# Altium PCB PCB1.PcbDoc
Units mil, origin at the board's own origin, x right, y up, seen from the top; angles counter-clockwise.
Board outline 2755.59 x 2755.91 mil, 4 copper layers (Top Layer, GND, Power, Bottom Layer 1), stack 23.756 mil thick; 47 components, 153 nets, 446 pads, 92 vias.
Unrouted connection lines stored in the file: 70.
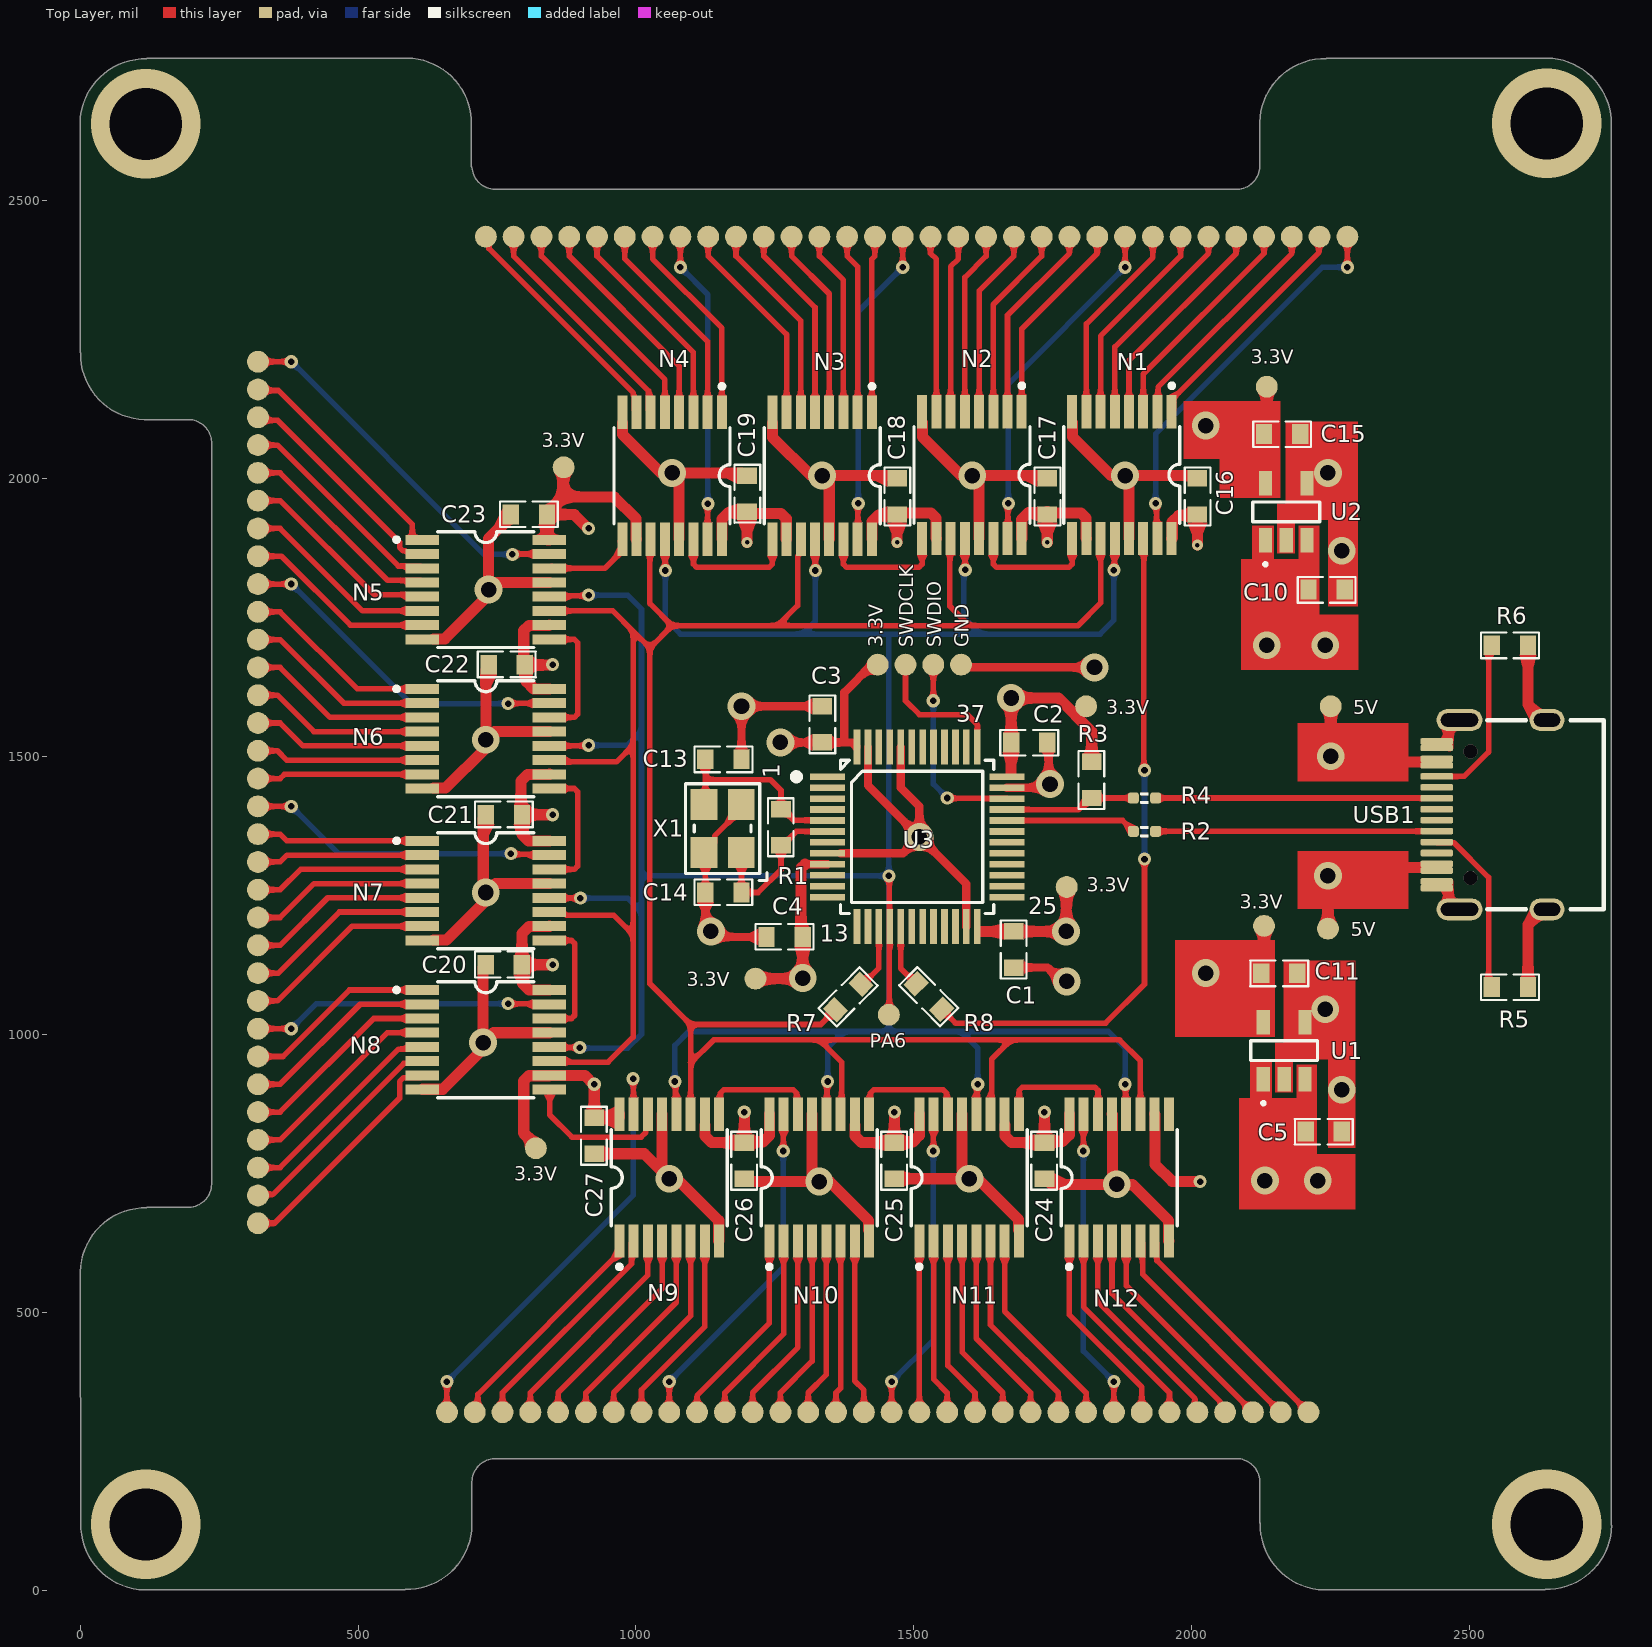
[diagram p0: Top Layer view]
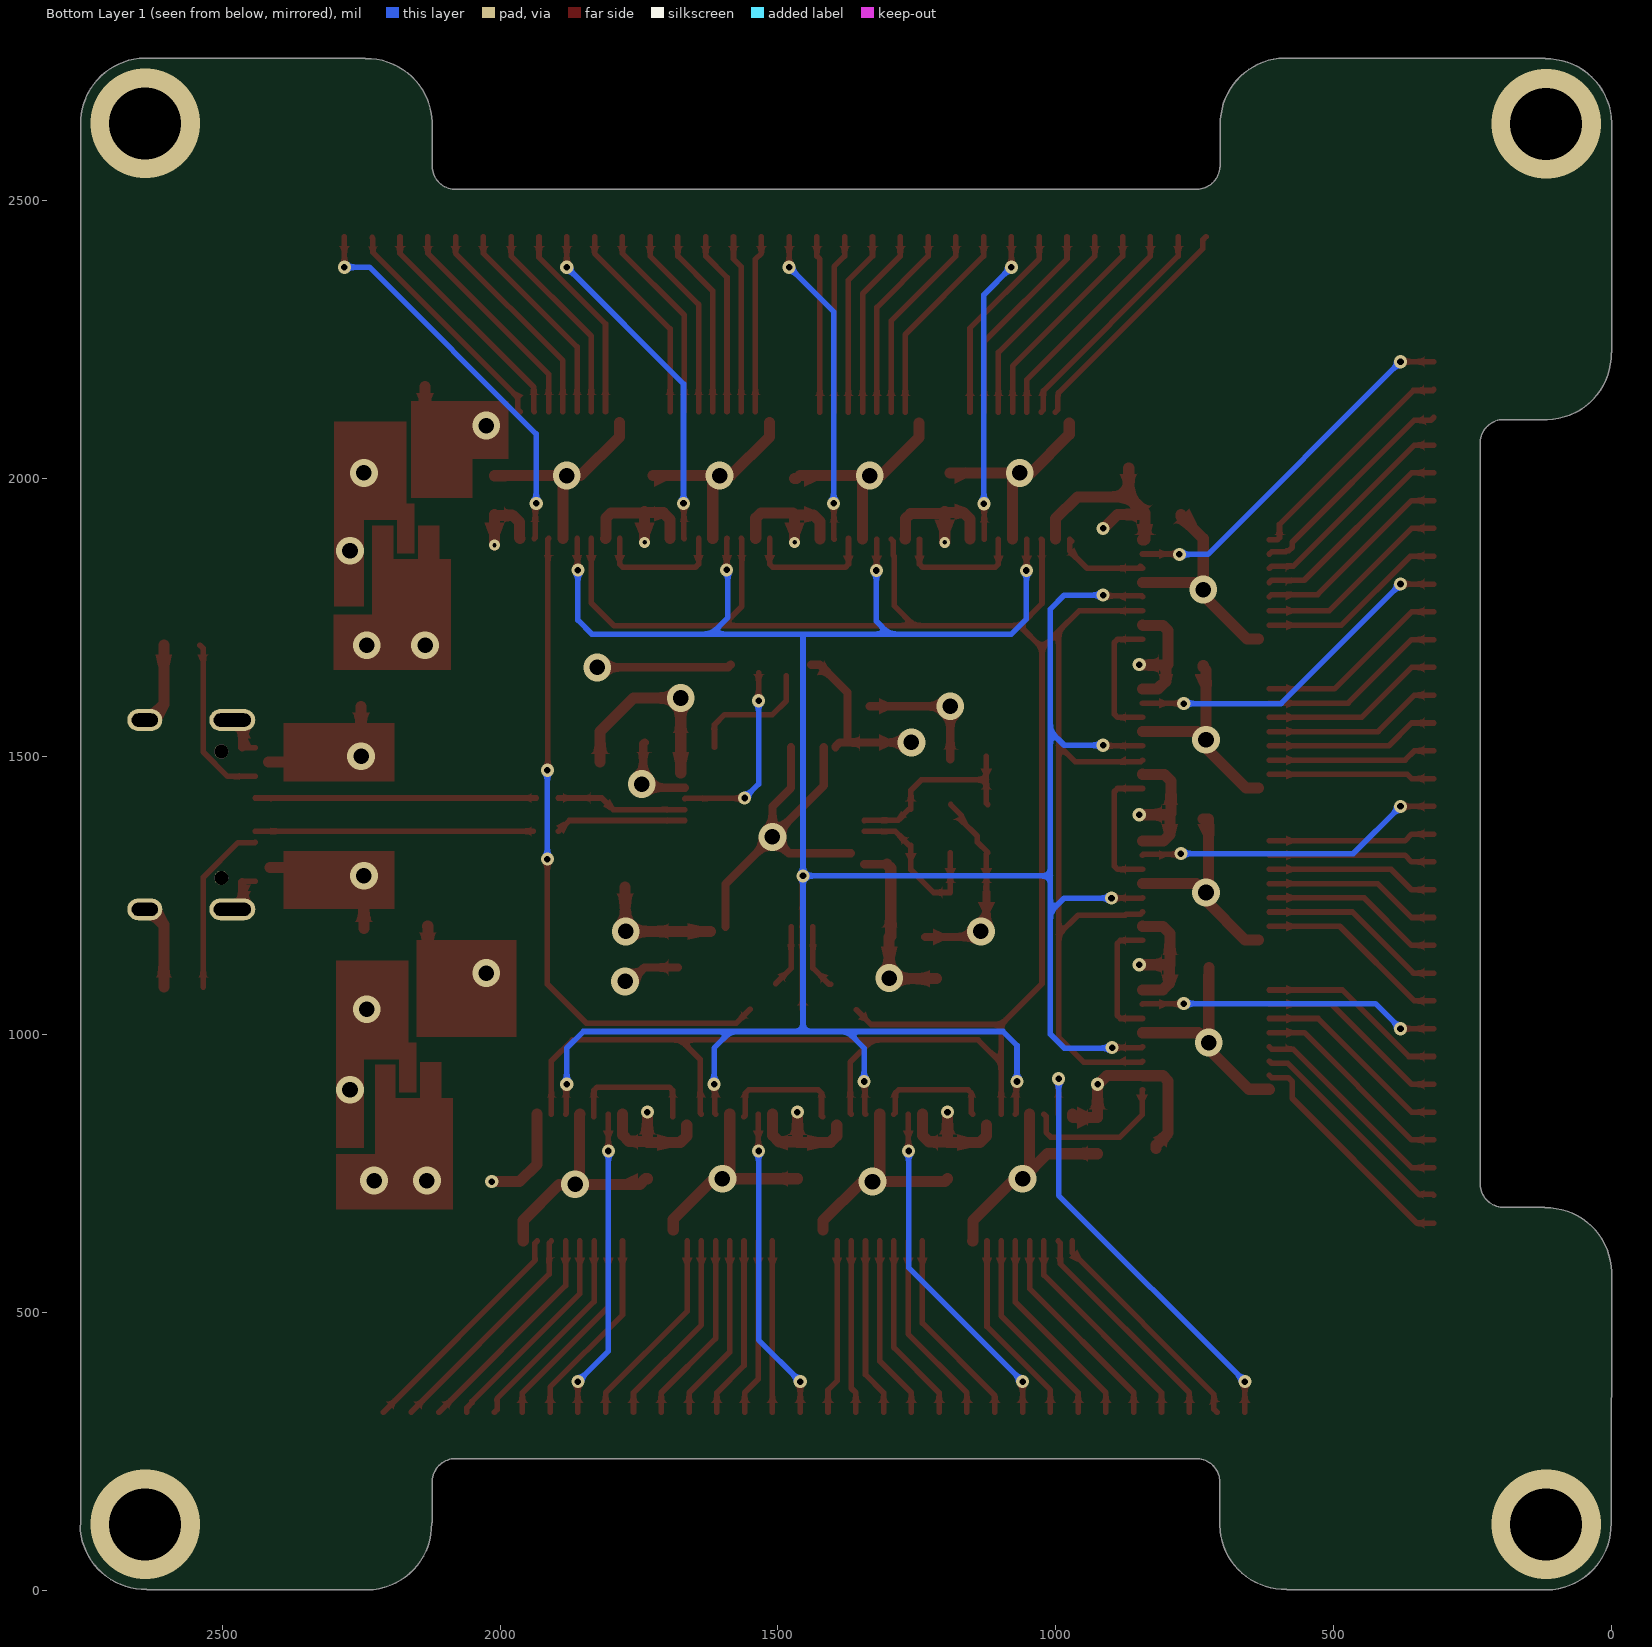
[diagram p1: Bottom Layer 1 view, seen from below]
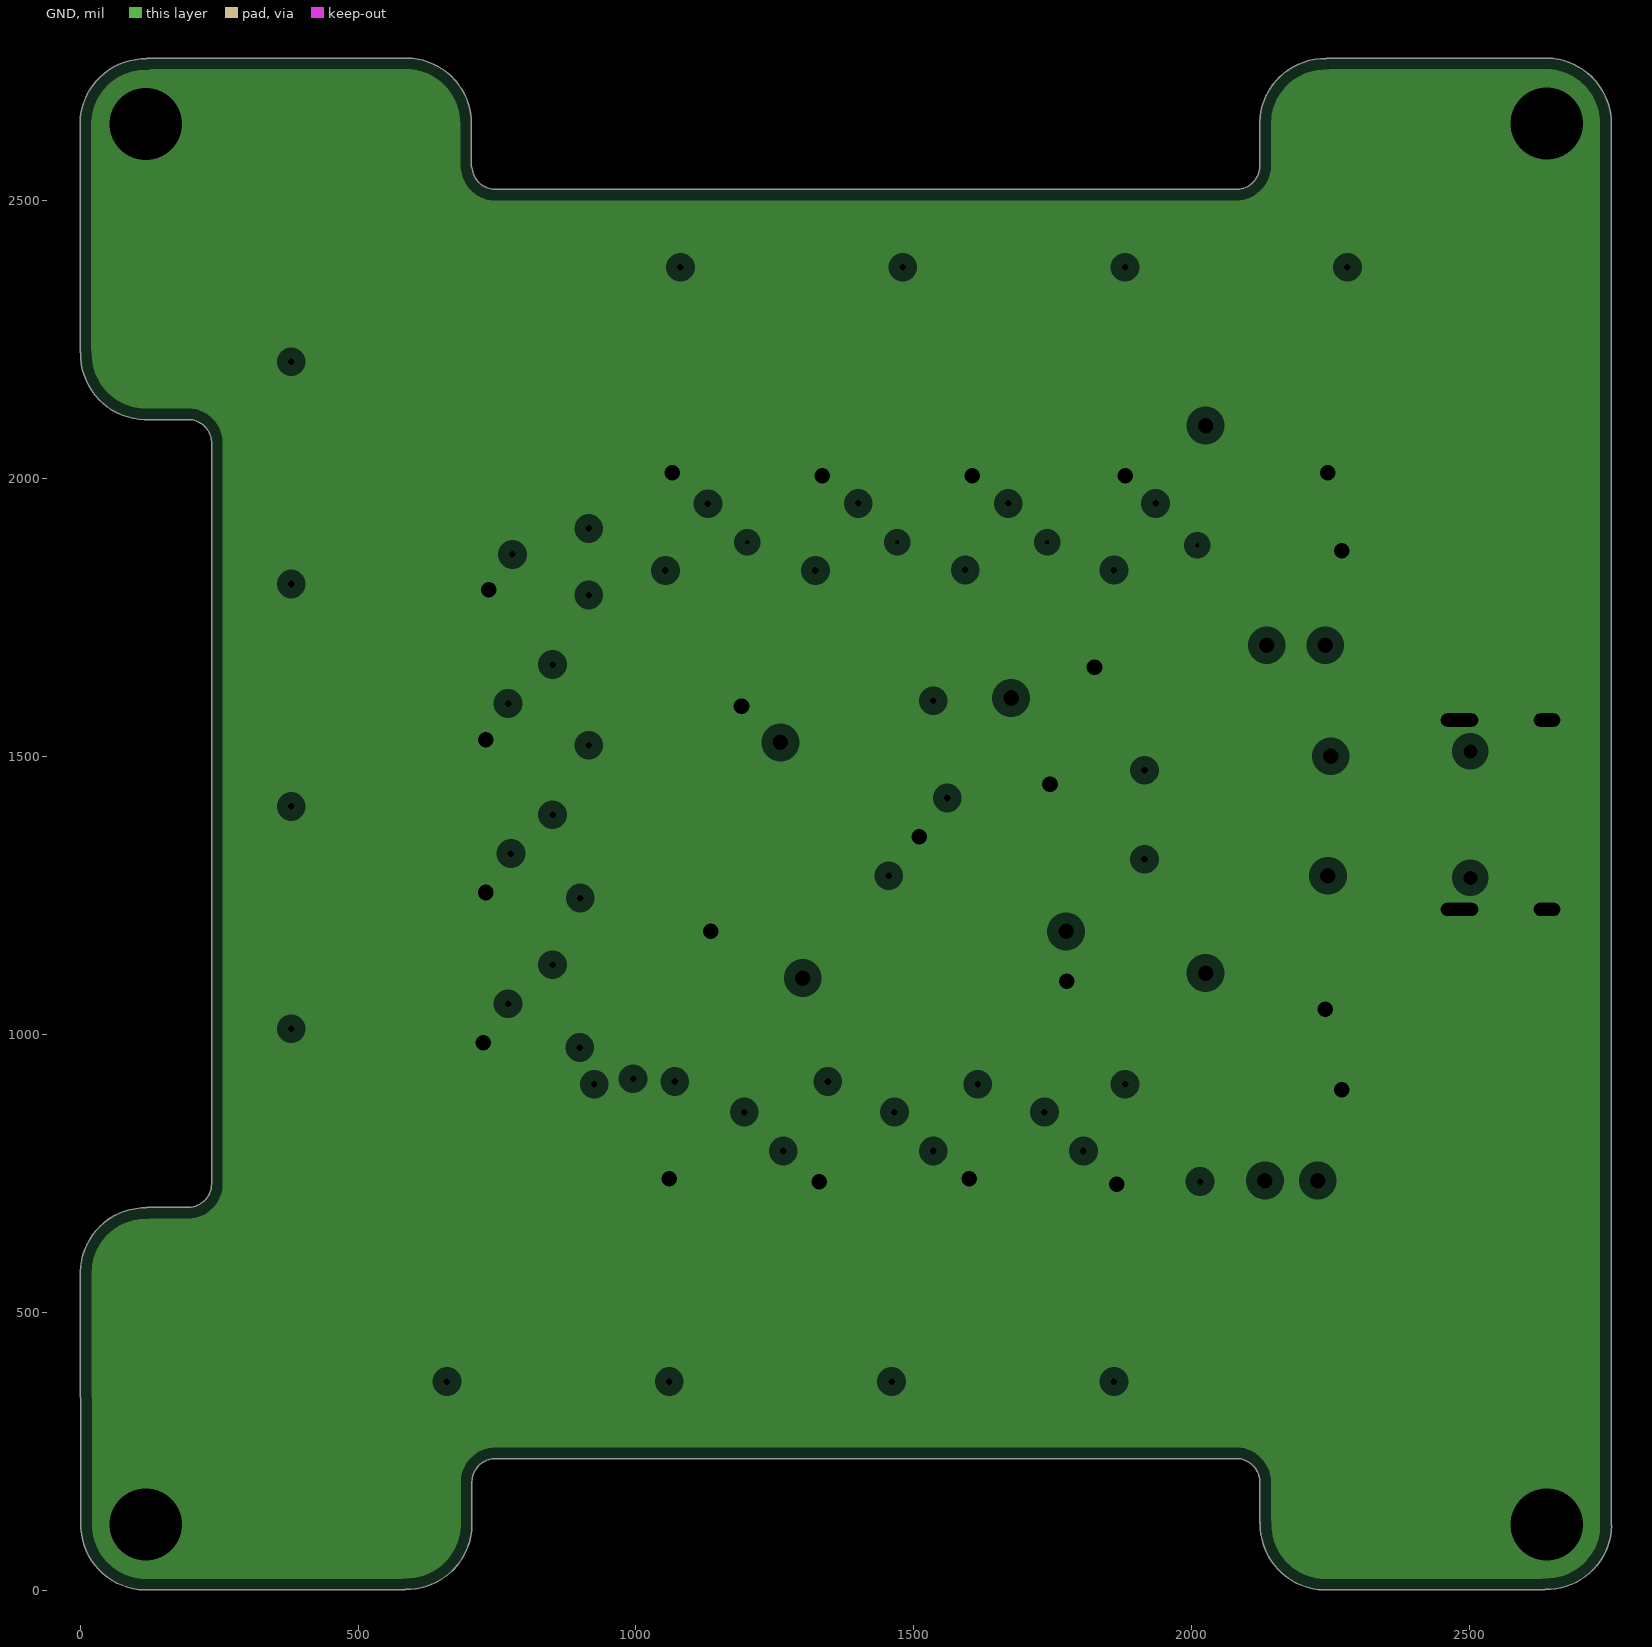
[diagram p2: GND, clearances drawn from the general rule]
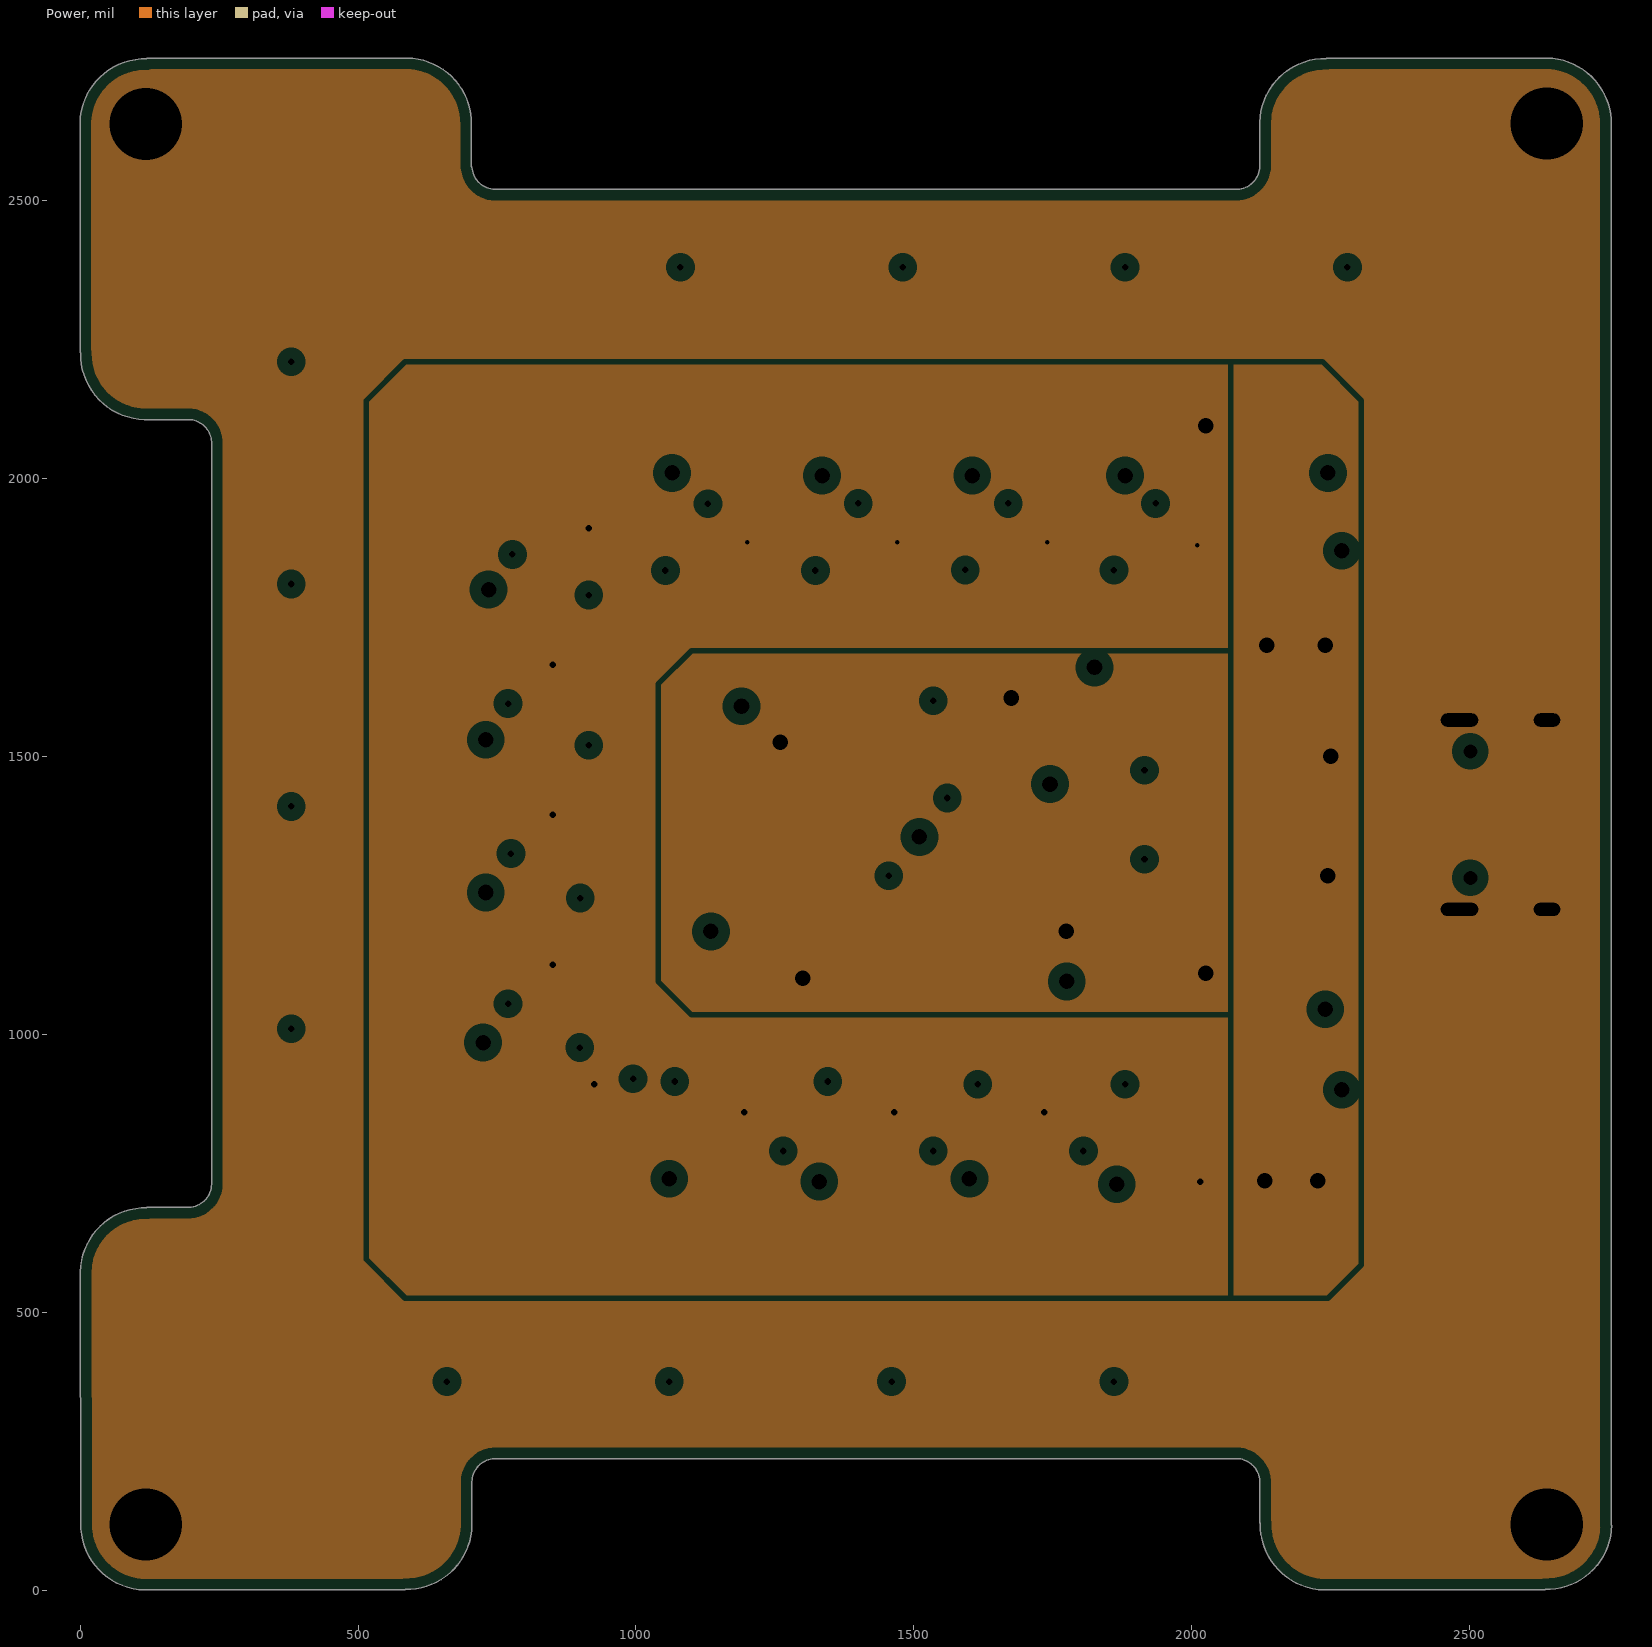
[diagram p3: Power, clearances drawn from the general rule]

## Layer stack, top to bottom
Top Solder: solder mask 0.4, Solder Resist, Dk 3.5
Top Layer: signal copper 1.378
Dielectric 2: prepreg 2.8, PP-006, Dk 4.1
GND: plane copper 1.4, net GND
Dielectric 1: dielectric 12.6, FR-4, Dk 4.8
Power: plane copper 1.4, net (Multiple Nets)
Dielectric 3: prepreg 2.8, PP-006, Dk 4.1
Bottom Layer 1: signal copper 1.378
Bottom Solder: solder mask 0.4, Solder Resist, Dk 3.5

## Board outline
1.22,120.31 0.31,572.68 cw(c117.81,570.18) 120.31,687.68 120.31,688.58 196.53,688.58 ccw(c194.03,731.08) 236.53,733.58 236.53,2065.91 ccw(c194.03,2063.41) 191.53,2105.91 115.91,2105.91 cw(c118.41,2223.41) 0.91,2225.91 0,2226.81 0,2640 cw(c117.5,2637.5) 120,2755 120,2756.22 589.09,2756.22 cw(c586.59,2638.72) 704.09,2636.22 704.09,2560.91 705,2560 ccw(c747.5,2562.5) 750,2520 2082.32,2520 ccw(c2079.82,2562.5) 2122.32,2565 2122.32,2640.31 cw(c2239.82,2637.81) 2242.32,2755.31 2242.32,2756.22 2639.69,2756.22 cw(c2637.19,2638.72) 2754.69,2636.22 2754.69,117.13 2755.59,116.22 cw(c2638.09,118.72) 2635.59,1.22 2635.59,0.31 2238.23,0.31 cw(c2240.73,117.81) 2123.23,120.31 2122.32,121.22 2122.32,196.53 ccw(c2079.82,194.03) 2077.32,236.53 745,236.53 ccw(c747.5,194.04) 705,191.53 705,116.22 cw(c587.5,118.72) 585,1.22 585,0.31 116.22,0.31 cw(c118.72,117.81)
board region "Default Layer Stack Region": 1.22,120.31 0.31,572.68 0.48,580.38 2.81,595.61 7.12,610.4 13.31,624.5 21.3,637.68 30.94,649.7 42.06,660.36 54.48,669.48 67.98,676.89 82.34,682.49 97.3,686.16 112.61,687.84 120.31,687.68 120.31,688.58 196.53,688.58 200.69,689.03 208.76,691.14 216.27,694.78 222.93,699.82 228.47,706.05 232.7,713.25 235.43,721.14 236.58,729.41 236.53,733.58 236.53,2065.91 236.09,2070.06 233.98,2078.14 230.34,2085.65 225.3,2092.3 219.06,2097.84 211.86,2102.07 203.98,2104.8 195.71,2105.95 191.53,2105.91 115.91,2105.91 108.2,2106.07 92.98,2108.41 78.18,2112.71 64.08,2118.91 50.9,2126.89 38.88,2136.53 28.22,2147.65 19.11,2160.07 11.69,2173.57 6.1,2187.93 2.43,2202.89 0.74,2218.2 0.91,2225.91 0,2226.81 0,2640 0.16,2647.7 2.5,2662.93 6.8,2677.72 13,2691.83 20.98,2705 30.62,2717.02 41.74,2727.68 54.16,2736.8 67.67,2744.22 82.02,2749.81 96.98,2753.48 112.3,2755.16 120,2755 120,2756.22 589.09,2756.22 596.8,2756.06 612.02,2753.72 626.82,2749.42 640.92,2743.22 654.1,2735.24 666.12,2725.6 676.78,2714.48 685.89,2702.06 693.31,2688.55 698.9,2674.2 702.57,2659.24 704.26,2643.92 704.09,2636.22 704.09,2560.91 705,2560 705.45,2555.85 707.56,2547.77 711.2,2540.26 716.23,2533.61 722.47,2528.06 729.67,2523.84 737.56,2521.1 745.82,2519.96 750,2520 2082.32,2520 2086.48,2520.45 2094.55,2522.56 2102.06,2526.2 2108.72,2531.23 2114.26,2537.47 2118.48,2544.67 2121.22,2552.56 2122.36,2560.82 2122.32,2565 2122.32,2640.31 2122.49,2648.02 2124.82,2663.24 2129.12,2678.04 2135.32,2692.14 2143.31,2705.32 2152.94,2717.34 2164.07,2728 2176.49,2737.11 2189.99,2744.53 2204.35,2750.12 2219.31,2753.79 2234.62,2755.48 2242.32,2755.31 2242.32,2756.22 2639.69,2756.22 2647.39,2756.06 2662.61,2753.72 2677.41,2749.42 2691.51,2743.22 2704.69,2735.24 2716.71,2725.6 2727.37,2714.48 2736.48,2702.06 2743.9,2688.55 2749.49,2674.2 2753.16,2659.24 2754.85,2643.92 2754.69,2636.22 2754.69,117.13 2755.59,116.22 2755.43,108.52 2753.09,93.29 2748.79,78.5 2742.59,64.39 2734.61,51.22 2724.97,39.2 2713.85,28.54 2701.43,19.42 2687.92,12 2673.57,6.41 2658.61,2.74 2643.29,1.06 2635.59,1.22 2635.59,0.31 2238.23,0.31 2230.53,0.48 2215.3,2.81 2200.51,7.12 2186.4,13.31 2173.23,21.3 2161.21,30.94 2150.55,42.06 2141.43,54.48 2134.01,67.98 2128.42,82.34 2124.75,97.3 2123.06,112.61 2123.23,120.31 2122.32,121.22 2122.32,196.53 2121.87,200.69 2119.77,208.76 2116.13,216.27 2111.09,222.93 2104.85,228.47 2097.65,232.7 2089.77,235.43 2081.5,236.58 2077.32,236.53 745,236.53 740.85,236.09 732.77,233.98 725.26,230.34 718.61,225.3 713.06,219.06 708.84,211.86 706.1,203.98 704.96,195.71 705,191.53 705,116.22 704.84,108.52 702.5,93.29 698.2,78.5 692,64.39 684.02,51.22 674.38,39.2 663.26,28.54 650.84,19.42 637.33,12 622.98,6.41 608.01,2.74 592.7,1.06 585,1.22 585,0.31 116.22,0.31 108.52,0.48 93.29,2.81 78.5,7.12 64.39,13.31 51.22,21.3 39.2,30.94 28.54,42.06 19.42,54.48 12,67.98 6.41,82.34 2.74,97.3 1.06,112.61
board region "Layer Stack Region 1": 1.22,120.31 0.31,572.68 0.48,580.38 2.81,595.61 7.12,610.4 13.31,624.5 21.3,637.68 30.94,649.7 42.06,660.36 54.48,669.48 67.98,676.89 82.34,682.49 97.3,686.16 112.61,687.84 120.31,687.68 120.31,688.58 196.53,688.58 200.69,689.03 208.76,691.14 216.27,694.78 222.93,699.82 228.47,706.05 232.69,713.25 235.43,721.14 236.57,729.41 236.53,733.58 236.53,2065.91 236.08,2070.06 233.98,2078.14 230.34,2085.64 225.3,2092.3 219.06,2097.84 211.86,2102.07 203.98,2104.8 195.71,2105.95 191.54,2105.91 115.91,2105.91 108.2,2106.07 92.98,2108.4 78.18,2112.71 64.08,2118.9 50.9,2126.89 38.88,2136.53 28.22,2147.65 19.11,2160.07 11.69,2173.57 6.1,2187.93 2.43,2202.89 0.74,2218.2 0.91,2225.91 0,2226.81 0,2640 0.16,2647.7 2.5,2662.93 6.8,2677.72 13,2691.83 20.98,2705 30.62,2717.02 41.74,2727.68 54.16,2736.8 67.67,2744.22 82.02,2749.81 96.98,2753.48 112.3,2755.16 120,2755 120,2756.22 589.09,2756.22 596.8,2756.06 612.02,2753.72 626.82,2749.42 640.92,2743.22 654.1,2735.24 666.12,2725.6 676.78,2714.48 685.89,2702.06 693.31,2688.55 698.9,2674.2 702.57,2659.24 704.26,2643.92 704.09,2636.22 704.09,2560.91 705,2560 705.45,2555.85 707.56,2547.77 711.2,2540.26 716.23,2533.61 722.47,2528.06 729.67,2523.84 737.56,2521.1 745.82,2519.96 750,2520 2082.32,2520 2086.48,2520.45 2094.55,2522.56 2102.06,2526.2 2108.72,2531.23 2114.26,2537.47 2118.48,2544.67 2121.22,2552.56 2122.36,2560.82 2122.32,2565 2122.32,2640.31 2122.49,2648.02 2124.82,2663.24 2129.12,2678.04 2135.32,2692.14 2143.31,2705.32 2152.94,2717.34 2164.07,2728 2176.49,2737.11 2189.99,2744.53 2204.34,2750.12 2219.31,2753.79 2234.62,2755.48 2242.32,2755.32 2242.32,2756.22 2639.69,2756.22 2647.39,2756.06 2662.62,2753.72 2677.41,2749.42 2691.51,2743.22 2704.69,2735.24 2716.71,2725.6 2727.37,2714.48 2736.49,2702.06 2743.9,2688.55 2749.49,2674.2 2753.16,2659.24 2754.85,2643.92 2754.69,2636.22 2754.69,117.13 2755.59,116.22 2755.43,108.52 2753.09,93.29 2748.79,78.5 2742.59,64.39 2734.61,51.22 2724.97,39.2 2713.85,28.54 2701.43,19.42 2687.93,12 2673.57,6.41 2658.61,2.74 2643.29,1.06 2635.59,1.22 2635.59,0.31 2238.23,0.31 2230.53,0.48 2215.3,2.81 2200.51,7.12 2186.4,13.31 2173.23,21.3 2161.21,30.94 2150.55,42.06 2141.43,54.48 2134.01,67.98 2128.42,82.34 2124.75,97.3 2123.06,112.61 2123.23,120.31 2122.32,121.22 2122.32,196.53 2121.87,200.69 2119.77,208.76 2116.13,216.27 2111.09,222.93 2104.85,228.47 2097.65,232.69 2089.77,235.43 2081.5,236.57 2077.32,236.53 745,236.53 740.85,236.08 732.77,233.98 725.26,230.34 718.61,225.3 713.06,219.06 708.84,211.86 706.1,203.98 704.96,195.71 705,191.54 705,116.22 704.84,108.52 702.5,93.29 698.2,78.5 692,64.39 684.02,51.22 674.38,39.2 663.26,28.54 650.84,19.42 637.33,12 622.98,6.41 608.02,2.74 592.7,1.06 585,1.22 585,0.31 116.22,0.31 108.52,0.48 93.29,2.81 78.5,7.12 64.39,13.31 51.22,21.3 39.2,30.94 28.54,42.06 19.42,54.48 12,67.98 6.41,82.34 2.74,97.3 1.06,112.61

## Design rules (kind name [scope] priority, off if disabled: settings)
Clearance [All] p1: gap=6 ignorepadtopadclearanceinfootprint=FALSE except(5.91: Text-Text; 11.81: Via-Poly)
ComponentClearance [All] p1: gap=6 collisioncheckmode=3 verticalgap=10 showdistances=FALSE
HoleSize [All] p1: absolutevalues=TRUE maxlimit=248.03 minlimit=7.87 maxpercent=80.000 minpercent=20.000
HoleToHoleClearance [All] p1: gap=5 allowstackedmicrovias=TRUE
MinimumSolderMaskSliver [All] p1: minsoldermaskwidth=2
PlaneClearance [All] p1: clearance=20
PlaneConnect [All] p1: planeconnectstyle=Relief reliefexpansion=20 reliefentries=4 reliefconductorwidth=10 reliefairgap=10
PolygonConnect [All] p1: connectstyle=Relief reliefconductorwidth=10 reliefentries=4 polygonreliefangle="90 Angle" airgapwidth=10
RoutingVias RoutingVias_3V3 [InNet('VCC3V3')] p1: holewidth=28 width=50 viastyle="Through Hole" minholewidth=7.87 minwidth=19.68 maxholewidth=28 maxwidth=50
RoutingVias RoutingVias_+5 [InNet('+5')] p2: holewidth=28 width=50 viastyle="Through Hole" minholewidth=28 minwidth=50 maxholewidth=28 maxwidth=50
RoutingVias [All] p3: holewidth=7.87 width=19.68 viastyle="Through Hole" minholewidth=7.87 minwidth=19.68 maxholewidth=236.22 maxwidth=248.03
SilkToSilkClearance [All] p1: silktosilkclearance=5
SilkToSolderMaskClearance [IsPad] p1: minsilkscreentomaskgap=2 clearancetoexposedcopper=TRUE
SolderMaskExpansion [All] p1: expansion=3.94 istentingtop=FALSE
SupplyNets "Schematic Supply Nets_3" [InNet('VCC3V3_MCU')] p1: voltage=0.000
SupplyNets "Schematic Supply Nets_2" [InNet('GND')] p2: voltage=0.000
SupplyNets "Schematic Supply Nets_1" [InNet('VCC3V3')] p3: voltage=0.000
SupplyNets "Schematic Supply Nets" [InNet('+5')] p4: voltage=0.000
Width Width_3V3 [InNet('VCC3V3')] p1 off: maxlimit=100 minlimit=10 preferedwidth=20
Width Width_+5 [InNet('+5')] p2: maxlimit=100 minlimit=10 preferedwidth=20
Width [All] p3: maxlimit=100 minlimit=5 preferedwidth=10
22 further rules are at their usual default settings.

## Components (designator, comment, footprint, x,y, rotation, side; value= is the part's Value field where it differs from the comment)
C1 "104，X7R" 0603 1680,1120 r90 top
C2 "104，X7R" 0603 1740,1525 r180 top
C3 "104，X7R" 0603 1335,1589.96 r270 top
C4 "104，X7R" 0603 1235,1175 r0 top
C5 "105，X7R" 0603 2270,825 r180 top
C10 "105，X7R" 0603 2275,1800 r180 top
C11 "105，X7R" 0603 2189.96,1110 r180 top
C13 "16pF,NP0" 0603 1190,1495 r180 top
C14 "16pF,NP0" 0603 1125,1255 r0 top
C15 "105，X7R" 0603 2194.96,2080 r180 top
C16 "104" 0603 2010,2000 r270 top
C17 "104" 0603 1740,2000 r270 top
C18 "104" 0603 1470,2000 r270 top
C19 "104" 0603 1200,2004.96 r270 top
C20 "104" 0603 730,1125 r0 top
C21 "104" 0603 730.04,1395 r0 top
C22 "104" 0603 735,1665 r0 top
C23 "104" 0603 775,1935 r0 top
C24 "104" 0603 1735,740.04 r90 top
C25 "104" 0603 1465,740 r90 top
C26 "104" 0603 1195,740.04 r90 top
C27 "104" 0603 925,785.04 r90 top
N1 "SN74HC595PWR" TSSOP16-0r65-5r0x4r4-H1r2 1874.33,2006.06 r270 top
N2 "SN74HC595PWR" TSSOP16-0r65-5r0x4r4-H1r2 1604.55,2006.06 r270 top
N3 "SN74HC595PWR" TSSOP16-0r65-5r0x4r4-H1r2 1335,2005 r270 top
N4 "SN74HC595PWR" TSSOP16-0r65-5r0x4r4-H1r2 1065,2005 r270 top
N5 "SN74HC595PWR" TSSOP16-0r65-5r0x4r4-H1r2 730,1800 r0 top
N6 "SN74HC595PWR" TSSOP16-0r65-5r0x4r4-H1r2 730,1531.67 r0 top
N7 "SN74HC595PWR" TSSOP16-0r65-5r0x4r4-H1r2 730,1258.33 r0 top
N8 "SN74HC595PWR" TSSOP16-0r65-5r0x4r4-H1r2 730,990 r0 top
N9 "SN74HC595PWR" TSSOP16-0r65-5r0x4r4-H1r2 1060,742.17 r90 top
N10 "SN74HC595PWR" TSSOP16-0r65-5r0x4r4-H1r2 1329.78,742.17 r90 top
N11 "SN74HC595PWR" TSSOP16-0r65-5r0x4r4-H1r2 1599.55,742.17 r90 top
N12 "SN74HC595PWR" TSSOP16-0r65-5r0x4r4-H1r2 1869.33,742.17 r90 top
R1 "910" 0603 1260.99,1340 r90 top
R2 "220" RES_0402 1915,1365 r180 top value=22R
R3 "152" 0603 1820,1425 r90 top
R4 "220" RES_0402 1915,1425 r180 top value=22R
R5 "512" 0603 2604.96,1085 r180 top
R6 "512" 0603 2604.96,1700 r180 top
R7 "330" 0603 1359.07,1044.03 r45 top
R8 "330" 0603 1550,1045 r135 top
U1 "LP5951MF-3.3" SOT23-5_2r90x1r60-H1r18-P0r95_G 2166.32,970.46 r0 top
U2 "LP5951MF-3.3" SOT23-5_2r90x1r60-H1r18-P0r95_G 2170,1940 r0 top
U3 "STM32F103C6T7A" LQFP48-0r5-7x7-H1r6 1505.99,1355 r0 top
USB1 "Type-C" TYPE-C_16P 2540,1395 r0 top
X1 "7V-8.000MAAE-T" RESO3225-4_3r20x2r50-H0r90-P2r10 1155.99,1370 r90 top

## Footprints (in the part's own frame and the unit in brackets; to place one, negate y for a bottom-side part, rotate by r counter-clockwise, add the part's x,y. Pads: shape width x height; smd on the part's side, far side on the other; paste and mask are expansions set on the pad)
0603 [mm]
  rect 0.75x0.9 smd mask+0.1: 1(0,0) 2(1.65,0)
  silkscreen extent -0.5,-0.58 2.15,0.6
LQFP48-0r5-7x7-H1r6 [mm]
  rect 1.6x0.305 smd paste+0 mask+0.051: 1(-4.1,2.75) 2(-4.1,2.25) 3(-4.1,1.75) 4(-4.1,1.25) 5(-4.1,0.75) 6(-4.1,0.25) 7(-4.1,-0.25) 8(-4.1,-0.75) 9(-4.1,-1.25) 10(-4.1,-1.75) 11(-4.1,-2.25) 12(-4.1,-2.75) 25(4.1,-2.75) 26(4.1,-2.25) 27(4.1,-1.75) 28(4.1,-1.25) 29(4.1,-0.75) 30(4.1,-0.25) 31(4.1,0.25) 32(4.1,0.75) 33(4.1,1.25) 34(4.1,1.75) 35(4.1,2.25) 36(4.1,2.75)
  rect 0.305x1.6 smd paste+0 mask+0.051: 13(-2.75,-4.1) 14(-2.25,-4.1) 15(-1.75,-4.1) 16(-1.25,-4.1) 17(-0.75,-4.1) 18(-0.25,-4.1) 19(0.25,-4.1) 20(0.75,-4.1) 21(1.25,-4.1) 22(1.75,-4.1) 23(2.25,-4.1) 24(2.75,-4.1) 37(2.75,4.1) 38(2.25,4.1) 39(1.75,4.1) 40(1.25,4.1) 41(0.75,4.1) 42(0.25,4.1) 43(-0.25,4.1) 44(-0.75,4.1) 45(-1.25,4.1) 46(-1.75,4.1) 47(-2.25,4.1) 48(-2.75,4.1)
  silkscreen extent -5.67,-3.5 3.5,3.5, body extent -3.52,-3.52 3.52,3.52, height 0.25
RES_0402 [mil] "RES_0402"
  rrect50% 20x20 smd mask+4: 1(-20,0) 2(20,0)
  silkscreen extent -7,-10 7,10, body extent -20,-10 20,10, height 14
RESO3225-4_3r20x2r50-H0r90-P2r10 [mil]
  rect 56x48 smd paste+0 mask+2.95: 1(-43.31,-33.46) 2(43.31,-33.46) 3(43.31,33.46) 4(-43.31,33.46)
  silkscreen extent -94,-80 81,67, body extent -64,-50 64,50, height 10
SOT23-5_2r90x1r60-H1r18-P0r95_G [mil]
  rect 24x44 smd paste+0 mask+2.95: 1(-37.4,-51.18) 2(0,-51.18) 3(37.4,-51.18) 4(37.4,51.18) 5(-37.4,51.18)
  silkscreen extent -60,-97 60,18, body extent -58,-32 58,32, height 10
TSSOP16-0r65-5r0x4r4-H1r2 [mm]
  rect 1.524x0.457 smd paste+0 mask+0.038: 1(-2.9,2.275) 2(-2.9,1.625) 3(-2.9,0.975) 4(-2.9,0.325) 5(-2.9,-0.325) 6(-2.9,-0.975) 7(-2.9,-1.625) 8(-2.9,-2.275) 9(2.9,-2.275) 10(2.9,-1.625) 11(2.9,-0.975) 12(2.9,-0.325) 13(2.9,0.325) 14(2.9,0.975) 15(2.9,1.625) 16(2.9,2.275)
  silkscreen extent -4.18,-2.65 2.2,2.65, body extent -2.22,-2.52 2.22,2.52, height 0.25
TYPE-C_16P [mm] "TYPE-C_16P"
  round 0.65 hole 0.65: 0(-0.98,-2.89) 0(-0.98,2.89)
  oval 1.6x1 hole 0.6 slot 1.2 at 0 deg: 1(2.52,4.325) 2(2.52,-4.325)
  oval 2.1x1 hole 0.6 slot 1.7 at 0 deg: 3(-1.48,-4.325) 4(-1.48,4.325)
  rrect50% 1.5x0.3 smd: A1(-2.52,-3.35) A4(-2.52,-2.55) A5(-2.52,-1.25) A6(-2.52,-0.25) A7(-2.52,0.25) A8(-2.52,1.25) A9(-2.52,2.55) A12(-2.52,3.35) B1(-2.52,3.05) B4(-2.52,2.25) B5(-2.52,1.75) B6(-2.52,0.75) B7(-2.52,-0.75) B8(-2.52,-1.75) B9(-2.52,-2.25) B12(-2.52,-3.05)
  silkscreen extent -0.22,-4.33 5.12,4.33, body extent -2.57,-4.48 5.18,4.48, height 3.26

## Part data
C1 C2 C3 C4 C5 C10 C11 C13 C14 C15 C16 C17 C18 C19 C20 C21 C22 C23 C24 C25 C26 C27: library part 0603电容
R1 R3 R5 R6 R7 R8: library part 0603电阻
R2 R4: library part Resistor_SMD, "Resistor_SMD"
USB1: library part USB-Type-C, "USB-Type-C_16P"

## Free pads (board coordinates)
  round 39.37 smd mask+4: 1(320,660) 1(320,1060) 1(320,1460) 1(320,1860) 1(660,320) 1(1060,320) 1(1080,2435) 1(1460,320) 1(1480,2435) 1(1585,1665) 1(1860,320) 1(1880,2435) 1(2280,2435) 2(320,710) 2(320,1110) 2(320,1510) 2(320,1910) 2(710,320) 2(1030,2435) 2(1110,320) 2(1430,2435) 2(1510,320) 2(1535,1665) 2(1830,2435) 2(1910,320) 2(2230,2435) 3(320,760) 3(320,1160) 3(320,1560) 3(320,1960) 3(760,320) 3(980,2435) 3(1160,320) 3(1380,2435) 3(1485,1665) 3(1560,320) 3(1780,2435) 3(1960,320) 3(2180,2435) 4(320,810) 4(320,1210) 4(320,1610) 4(320,2010) 4(810,320) 4(930,2435) 4(1210,320) 4(1330,2435) 4(1435,1665) 4(1610,320) 4(1730,2435) 4(2010,320) 4(2130,2435) 5(320,860) 5(320,1260) 5(320,1660) 5(320,2060) 5(860,320) 5(880,2435) 5(1260,320) 5(1280,2435) 5(1660,320) 5(1680,2435) 5(2060,320) 5(2080,2435) 6(320,910) 6(320,1310) 6(320,1710) 6(320,2110) 6(830,2435) 6(910,320) 6(1230,2435) 6(1310,320) 6(1630,2435) 6(1710,320) 6(2030,2435) 6(2110,320) 7(320,960) 7(320,1360) 7(320,1760) 7(320,2160) 7(780,2435) 7(960,320) 7(1180,2435) 7(1360,320) 7(1580,2435) 7(1760,320) 7(1980,2435) 7(2160,320) 8(320,1010) 8(320,1410) 8(320,1810) 8(320,2210) 8(730,2435) 8(1010,320) 8(1130,2435) 8(1410,320) 8(1530,2435) 8(1810,320) 8(1930,2435) 8(2210,320)
  round 39.37 smd paste-99999 mask+3.94: 9(1810,1590) 10(1775,1265) 11(1215,1100) 12(820,795) 13(870,2020) 14(2250,1590) 15(2245,1190) 16(2135,2165) 17(2130,1195) 18(1455,1035)

## Via types
v1: diameter 23.62, hole 11.81, Top Layer to Bottom Layer 1, tented both sides, 50 vias
v2: diameter 50, hole 28, Top Layer to Bottom Layer 1, tented both sides, 34 vias
v3: diameter 19.68, hole 7.87, Top Layer to Bottom Layer 1, tented both sides, 4 vias
v4: diameter 196.85, hole 129.92, Top Layer to Bottom Layer 1, 4 vias

## Nets (pads, with @x,y where several pads share a name; then routed paths per layer and width w, separated by ;. In a path a pad name is that pad's centre, name@x,y a point inside that pad or via, vN(x,y) a via of type N, cw(c..) or ccw(c..) an arc to the next point about the centre after c; other vN are vias at no path point)
+5: C5.2 C10.2 pad.14 pad.15 U1.1 U1.3 U2.1 U2.3 USB1.A4 USB1.A9 USB1.B4 USB1.B9 | length 528
  Top Layer w15: v2@2265,1290 2275,1300
  Top Layer w20: U2.1@2131.3,1887.52 U2.1 ; v2(2135,1700) v2@2141.18,1706.18 ; pad.15 v2(2245,1285) ; v2@2245,1502.5 v2@2247.5,1500 ; pad.14 v2(2250,1500) v2@2247.5,1500 ; 2275,1300 USB1.A4@2413.94,1300 ; USB1.A9@2416.67,1490 2257.5,1490 v2@2247.5,1500
  other v2: 2131.68,736.68 2226.68,736.68 2240,1700
bit1: N1.15 pad.1@2280,2435 | length 713.7
  Top Layer w10: v1(1935,1955) 1936.65,1953.35 1936.65,1893.54 N1.15 ; v1(2280,2380) pad.1@2280,2435
  Bottom Layer 1 w10: v1(1935,1955) 1935,2080 2235,2380 v1(2280,2380)
bit2: N1.1 pad.2@2230,2435 | length 423.4
  Top Layer w10: N1.1 1967.89,2124.23 1967.89,2145.75 2228.77,2406.63 2228.77,2431.27 pad.2@2230.33,2433.46
bit3: N1.2 pad.3@2180,2435 | length 414.9
  Top Layer w10: N1.2 1939.38,2121.3 1939.38,2164.38 2180,2405 pad.3@2180,2435
bit4: N1.3 pad.4@2130,2435 | length 404.8
  Top Layer w10: N1.3 1912.72,2187.72 2130,2405 pad.4@2130,2435
bit5: N1.4 pad.5@2080,2435 | length 394.7
  Top Layer w10: N1.4 1887.13,2212.13 2080,2405 pad.5@2080,2435
bit6: N1.5 pad.6@2030,2435 | length 384.5
  Top Layer w10: N1.5 1861.54,2236.54 2030,2405 pad.6@2030,2435
bit7: N1.6 pad.7@1980,2435 | length 374.4
  Top Layer w10: N1.6 1835.95,2255.95 1980,2400 pad.7@1980,2435
bit8: N1.7 pad.8@1930,2435 | length 364.3
  Top Layer w10: N1.7 1810.35,2278.09 1930,2397.74 pad.8@1930,2435
bit9: N2.15 pad.1@1880,2435 | length 635.7
  Top Layer w10: N2.15 1669.27,1892.63 1669.27,1954.27 v1(1670,1955) ; v1@1880,2375 v1(1880,2380) pad.1@1880,2435
  Bottom Layer 1 w10: v1(1670,1955) 1670,2170 v1(1880,2380)
bit10: N2.1 pad.2@1830,2435 | length 371
  Top Layer w10: N2.1 1694.12,2269.12 1830,2405 pad.2@1830,2435
bit11: N2.2 pad.3@1780,2435 | length 360.9
  Top Layer w10: N2.2 1668.53,2293.53 1780,2405 pad.3@1780,2435
bit12: N2.3 pad.4@1730,2435 | length 350.8
  Top Layer w10: N2.3 1642.94,2312.94 1730,2400 pad.4@1730,2435
bit13: N2.4 pad.5@1680,2435 | length 340.7
  Top Layer w10: N2.4 1617.35,2337.35 1680,2400 pad.5@1680,2435
bit14: N2.5 pad.6@1630,2435 | length 330.6
  Top Layer w10: N2.5 1591.76,2361.76 1630,2400 pad.6@1630,2435
bit15: N2.6 pad.7@1580,2435 | length 320.5
  Top Layer w10: N2.6 1566.17,2381.17 1580,2395 pad.7@1580,2435
bit16: N2.7 pad.8@1530,2435 | length 319.1
  Top Layer w10: pad.8@1530,2435 1530,2405 1540.58,2394.42 N2.7
bit17: N3.15 pad.1@1480,2435 | length 577.7
  Top Layer w10: N3.15 1399.49,1891.34 1399.49,1954.49 v1(1400,1955) ; v1(1480,2380) 1480,2386.81 pad.1@1480,2435
  Bottom Layer 1 w10: v1(1400,1955) 1400,2300 v1(1480,2380)
bit18: N3.1 pad.2@1430,2435 | length 318.1
  Top Layer w10: N3.1 1424.57,2394.57 1430,2400 pad.2@1430,2435
bit19: N3.2 pad.3@1380,2435 | length 323.7
  Top Layer w10: pad.3@1380,2435 1380,2400 1398.98,2381.02 N3.2
bit20: N3.3 pad.4@1330,2435 | length 333.8
  Top Layer w10: pad.4@1330,2435 1330,2400 1373.39,2356.61 N3.3
bit21: N3.4 pad.5@1280,2435 | length 343.9
  Top Layer w10: pad.5@1280,2435 1280,2400 1347.8,2332.2 N3.4
bit22: N3.5 pad.6@1230,2435 | length 354
  Top Layer w10: pad.6@1230,2435 1230,2400 1322.2,2307.8 N3.5
bit23: N3.6 pad.7@1180,2435 | length 364.1
  Top Layer w10: pad.7@1180,2435 1180,2400 1296.61,2283.39 N3.6
bit24: N3.7 pad.8@1130,2435 | length 374.2
  Top Layer w10: pad.8@1130,2435 1130,2400 1271.02,2258.98 N3.7
bit25: N4.15 pad.1@1080,2435 | length 569.2
  Top Layer w10: v1@1080,2375 v1(1080,2380) pad.1@1080,2435 ; N4.15 v1@1128.98,1953.98
  Bottom Layer 1 w10: v1(1080,2380) 1129.49,2330.51 v1(1129.49,1954.49)
bit26: N4.1 pad.2@1030,2435 | length 367.4
  Top Layer w10: pad.2@1030,2435 1030,2395 1154.57,2270.43 N4.1
bit27: N4.2 pad.3@980,2435 | length 377.5
  Top Layer w10: pad.3@980,2435 980,2395 1128.98,2246.02 N4.2
bit28: N4.3 pad.4@930,2435 | length 387.6
  Top Layer w10: pad.4@930,2435 930,2400 1103.38,2226.62 N4.3
bit29: N4.4 pad.5@880,2435 | length 397.8
  Top Layer w10: pad.5@880,2435 880,2400 1077.79,2202.21 N4.4
bit30: N4.5 pad.6@830,2435 | length 407.9
  Top Layer w10: pad.6@830,2435 830,2400 1052.2,2177.8 N4.5
bit31: N4.6 pad.7@780,2435 | length 418
  Top Layer w10: pad.7@780,2435 780,2400 1022.62,2157.38 1022.62,2123.17 N4.6
bit32: N4.7 pad.8@730,2435 | length 428.1
  Top Layer w10: pad.8@730,2435 735.62,2429.38 735.62,2413.54 995.43,2153.73 995.43,2150.03 997.03,2148.43 997.03,2123.17 N4.7
bit33: N5.15 pad.8@320,2210 | length 668
  Top Layer w10: pad.8@320,2210 v1(380,2210) ; v1(777.76,1863.38) 778.35,1863.98 N5.15
  Bottom Layer 1 w10: v1(380,2210) 726.62,1863.38 v1(777.76,1863.38)
bit34: N5.1 pad.7@320,2160 | length 421.8
  Top Layer w10: pad.7@320,2160 321.83,2158.17 356.83,2158.17 597.69,1917.31 597.69,1893.56 601.68,1889.57 N5.1
bit35: N5.2 pad.6@320,2110 | length 403.1
  Top Layer w10: pad.6@320,2110 325.62,2104.38 355.62,2104.38 574.83,1885.17 574.83,1876.01 581.27,1869.57 584.97,1869.57 586.57,1867.97 611.83,1867.97 N5.2
bit36: N5.3 pad.5@320,2060 | length 387.6
  Top Layer w10: pad.5@320,2060 355,2060 572.62,1842.38 611.83,1842.38 N5.3
bit37: N5.4 pad.4@320,2010 | length 377.5
  Top Layer w10: pad.4@320,2010 360,2010 553.21,1816.79 611.83,1816.79 N5.4
bit38: N5.5 pad.3@320,1960 | length 367.4
  Top Layer w10: pad.3@320,1960 360,1960 529.21,1790.79 612.24,1790.79 N5.5
bit39: N5.6 pad.2@320,1910 | length 357.3
  Top Layer w10: pad.2@320,1910 360,1910 508.39,1761.61 N5.6
bit40: N5.7 pad.1@320,1860 | length 347.2
  Top Layer w10: pad.1@320,1860 362.26,1860 486.24,1736.02 N5.7
bit41: N6.15 pad.8@320,1810 | length 613.5
  Top Layer w10: pad.8@320,1810 v1(380,1810) ; v1(770,1595) 770.32,1595.32 843.85,1595.32 N6.15
  Bottom Layer 1 w10: v1(380,1810) 595,1595 v1(770,1595)
bit42: N6.1 pad.7@320,1760 | length 353.3
  Top Layer w10: pad.7@320,1760 360,1760 498.77,1621.23 N6.1
bit43: N6.2 pad.6@320,1710 | length 343.2
  Top Layer w10: pad.6@320,1710 360,1710 474.36,1595.64 N6.2
bit44: N6.3 pad.5@320,1660 | length 333.1
  Top Layer w10: pad.5@320,1660 360,1660 449.95,1570.05 N6.3
bit45: N6.4 pad.4@320,1610 | length 323
  Top Layer w10: pad.4@320,1610 355,1610 420.54,1544.46 N6.4
bit46: N6.5 pad.3@320,1560 | length 312.9
  Top Layer w10: pad.3@320,1560 360,1560 401.13,1518.87 N6.5
bit47: N6.6 pad.2@320,1510 | length 302.8
  Top Layer w10: pad.2@320,1510 355,1510 371.72,1493.28 N6.6
bit48: N6.7 pad.1@320,1460 | length 299
  Top Layer w10: pad.1@320,1460 360,1460 367.69,1467.69 N6.7
bit49: N7.15 pad.8@320,1410 | length 560.5
  Top Layer w10: pad.8@320,1410 v1(380,1410) ; v1(775,1325) 776.35,1323.66 842.83,1323.66 N7.15
  Bottom Layer 1 w10: v1(380,1410) 465,1325 v1(775,1325)
bit50: N7.1 pad.7@320,1360 | length 300.8
  Top Layer w10: pad.7@320,1360 360,1360 372.1,1347.9 N7.1
bit51: N7.2 pad.6@320,1310 | length 300.9
  Top Layer w10: pad.6@320,1310 360,1310 372.31,1322.31 N7.2
bit52: N7.3 pad.5@320,1260 | length 311
  Top Layer w10: pad.5@320,1260 360,1260 396.72,1296.72 N7.3
bit53: N7.4 pad.4@320,1210 | length 321.1
  Top Layer w10: pad.4@320,1210 360,1210 421.13,1271.13 N7.4
bit54: N7.5 pad.3@320,1160 | length 331.3
  Top Layer w10: pad.3@320,1160 360,1160 445.54,1245.54 N7.5
bit55: N7.6 pad.2@320,1110 | length 341.4
  Top Layer w10: pad.2@320,1110 356.59,1110 466.54,1219.95 N7.6
bit56: N7.7 pad.1@320,1060 | length 351.5
  Top Layer w10: pad.1@320,1060 355,1060 489.36,1194.36 N7.7
bit57: N8.15 pad.8@320,1010 | length 543.2
  Top Layer w10: pad.8@320,1010 v1(380,1010) ; v1(770,1055) 770.51,1054.49 843.66,1054.49 N8.15
  Bottom Layer 1 w10: v1(380,1010) 425,1055 v1(770,1055)
bit58: N8.1 pad.7@320,960 | length 345.4
  Top Layer w10: pad.7@320,960 365,960 484.57,1079.57 N8.1
bit59: N8.2 pad.6@320,910 | length 355.5
  Top Layer w10: pad.6@320,910 360,910 503.98,1053.98 N8.2
bit60: N8.3 pad.5@320,860 | length 365.6
  Top Layer w10: pad.5@320,860 360,860 528.39,1028.39 N8.3
bit61: N8.4 pad.4@320,810 | length 375.7
  Top Layer w10: pad.4@320,810 360,810 552.8,1002.8 N8.4
bit62: N8.5 pad.3@320,760 | length 385.8
  Top Layer w10: pad.3@320,760 360,760 573.21,973.21 611.83,973.21 N8.5
bit63: N8.6 pad.2@320,710 | length 395.9
  Top Layer w10: pad.2@320,710 322.03,712.03 347.03,712.03 582.62,947.62 611.83,947.62 N8.6
bit64: N8.7 pad.1@320,660 | length 423.6
  Top Layer w10: pad.1@320,660 350,660 574.83,884.83 574.83,914.83 582.03,922.03 611.83,922.03 N8.7
bit65: N9.15 pad.1@660,320 | length 802.8
  Top Layer w10: pad.1@660,320 v1(660,375) ; v1(995,920) 995.51,919.49 995.51,856.85 N9.15
  Bottom Layer 1 w10: v1(660,375) 995,710 v1(995,920)
bit66: N9.1 pad.2@710,320 | length 415.9
  Top Layer w10: pad.2@710,320 715.62,325.62 715.62,352.17 970.43,606.99 N9.1
bit67: N9.2 pad.3@760,320 | length 405.8
  Top Layer w10: pad.3@760,320 760,355 992.03,587.03 992.03,624 N9.2
bit68: N9.3 pad.4@810,320 | length 395.6
  Top Layer w10: pad.4@810,320 810,355 1021.61,566.61 N9.3
bit69: N9.4 pad.5@860,320 | length 385.5
  Top Layer w10: pad.5@860,320 860,355 1047.2,542.2 N9.4
bit70: N9.5 pad.6@910,320 | length 375.4
  Top Layer w10: pad.6@910,320 910,355 1072.8,517.8 N9.5
bit71: N9.6 pad.7@960,320 | length 365.3
  Top Layer w10: pad.7@960,320 960,355 1098.39,493.39 N9.6
bit72: N9.7 pad.8@1010,320 | length 355.2
  Top Layer w10: pad.8@1010,320 1010,360 1123.98,473.98 N9.7
bit73: N10.15 pad.1@1060,320 | length 621.6
  Top Layer w10: pad.1@1060,320 v1(1060,375) ; v1(1265,790) 1265.4,790.4 1265.4,855.94 N10.15
  Bottom Layer 1 w10: v1(1060,375) 1265,580 v1(1265,790)
bit74: N10.1 pad.2@1110,320 | length 361.9
  Top Layer w10: pad.2@1110,320 1110,350 1240.21,480.21 N10.1
bit75: N10.2 pad.3@1160,320 | length 351.8
  Top Layer w10: pad.3@1160,320 1160,355 1265.8,460.8 N10.2
bit76: N10.3 pad.4@1210,320 | length 341.7
  Top Layer w10: pad.4@1210,320 1210,355 1291.39,436.39 N10.3
bit77: N10.4 pad.5@1260,320 | length 331.6
  Top Layer w10: pad.5@1260,320 1260,355 1316.98,411.98 N10.4
bit78: N10.5 pad.6@1310,320 | length 321.5
  Top Layer w10: pad.6@1310,320 1310,355 1342.57,387.57 N10.5
bit79: N10.6 pad.7@1360,320 | length 311.4
  Top Layer w10: pad.7@1360,320 1360,355 1368.16,363.16 N10.6
bit80: N10.7 pad.8@1410,320 | length 314.7
  Top Layer w10: N10.7 1393.75,376.25 1410,360 pad.8@1410,320
bit81: N11.15 pad.1@1460,320 | length 567.6
  Top Layer w10: pad.1@1460,320 v1(1460,375) ; v1(1535,790) 1535.29,790.29 1535.29,856.05 N11.15
  Bottom Layer 1 w10: v1(1460,375) 1535,450 v1(1535,790)
bit82: N11.1 pad.2@1510,320 | length 308
  Top Layer w10: pad.2@1509.99,320.01 N11.1
bit83: N11.2 pad.3@1560,320 | length 318.1
  Top Layer w10: N11.2 1535.58,379.42 1560,355 pad.3@1560,320
bit84: N11.3 pad.4@1610,320 | length 328.2
  Top Layer w10: N11.3 1561.17,403.83 1610,355 pad.4@1610,320
bit85: N11.4 pad.5@1660,320 | length 338.3
  Top Layer w10: N11.4 1586.76,428.24 1660,355 pad.5@1660,320
bit86: N11.5 pad.6@1710,320 | length 348.4
  Top Layer w10: N11.5 1612.35,452.65 1710,355 pad.6@1710,320
bit87: N11.6 pad.7@1760,320 | length 358.6
  Top Layer w10: N11.6 1637.94,477.06 1760,355 pad.7@1760,320
bit88: N11.7 pad.8@1810,320 | length 368.7
  Top Layer w10: N11.7 1663.53,501.47 1810,355 pad.8@1810,320
bit89: N12.15 pad.1@1860,320 | length 559.3
  Top Layer w10: v1(1805,790) 1805.18,790.18 1805.18,856.16 N12.15 ; pad.1@1860,320 v1(1860,375)
  Bottom Layer 1 w10: v1(1805,790) 1805,430 v1(1860,375)
bit90: N12.1 pad.2@1910,320 | length 361.9
  Top Layer w10: N12.1 1779.76,495.24 1910,365 pad.2@1910,320
bit91: N12.2 pad.3@1960,320 | length 372
  Top Layer w10: N12.2 1805.35,509.65 1960,355 pad.3@1960,320
bit92: N12.3 pad.4@2010,320 | length 382.2
  Top Layer w10: N12.3 1830.95,519.05 2005.47,344.53 2005.47,324.53 pad.4@2010,320
bit93: N12.4 pad.5@2060,320 | length 392.3
  Top Layer w10: N12.4 1856.54,533.46 2050.47,339.53 2050.47,337.47 2060,327.95 pad.5@2060,320
bit94: N12.5 pad.6@2110,320 | length 402.4
  Top Layer w10: N12.5 1882.13,547.87 pad.6@2110,320
bit95: N12.6 pad.7@2160,320 | length 412.5
  Top Layer w10: N12.6 1911.71,624 1911.71,568.29 pad.7@2160,320
bit96: N12.7 pad.8@2210,320 | length 422.6
  Top Layer w10: N12.7 1937.3,624 1937.3,592.7 pad.8@2210,320
BOOT1: U3.20
GND: C1.1 C2.1 C3.1 C4.1 C5.1 C10.1 C11.1 C13.1 C14.1 C15.1 C16.1 C17.1 C18.1 C19.1 C20.1 C21.1 C22.1 C23.1 C24.1 C25.1 C26.1 C27.1 N1.8 N1.13 N2.8 N2.13 N3.8 N3.13 N4.8 N4.13 N5.8 N5.13 N6.8 N6.13 N7.8 N7.13 N8.8 N8.13 N9.8 N9.13 N10.8 N10.13 N11.8 N11.13 N12.8 N12.13 pad.1@1585,1665 R5.1 R6.1 U1.2 U1.4 U2.2 U2.4 U3.8 U3.23 U3.35 U3.44 U3.47 USB1.1 USB1.2 USB1.3 USB1.4 USB1.A1 USB1.A12 USB1.B1 USB1.B12 X1.2 X1.4 | length 7120.6
  Top Layer w10: C14.1 1125,1324.22 X1.4 1141.53,1345.69 1141.53,1356.53 1170.45,1385.45 1170.45,1394.31 X1.2 ; USB1.B12 2462.82,1274.92 USB1.B12@2463.72,1274.02 ; USB1.B1 2462.82,1515.08 USB1.B1@2463.72,1515.98 ; USB1.3@2463.72,1238.29 2477.29,1224.72 USB1.3 ; USB1.4@2463.72,1551.71 2477.29,1565.28 USB1.4
  Top Layer w15: C14.1 1125,1197.33 1135,1187.33 v2(1135,1185) 1137.33,1185 1147.33,1175 C4.1 ; C13.1 1190,1567.67 1200,1577.67 v2@1200,1580 ; v2(1190,1590) v2@1200,1580 ; C3.1 C3.1 1212.33,1590 1202.33,1580 v2@1200,1580 ; U3.8@1368.57,1325.47 1480.47,1325.47 v2(1510,1355) ; U3.47 1417.41,1447.59 v2(1510,1355) ; U3.44 1476.64,1516.24 1476.64,1443.36 1510,1410 v2(1510,1355) ; pad.1@1585,1665 1589.66,1660.34 1605.63,1660.34 1605.97,1660 v2(1825,1660) ; U3.23 1594.57,1270.43 v2(1510,1355) ; U3.35 1738.58,1443.58 v2(1745,1450) ; C1.1 1740.53,1120 1765.53,1095 v2(1775,1095) ; v2@1740,1455 1742.5,1457.5 1742.5,1522.5 C2.1 ; USB1.3@2463.72,1238.29 USB1.B12@2463.72,1274.02 ; USB1.B1@2463.72,1515.98 USB1.4@2463.72,1551.71
  Top Layer w20: N8.8 616.42,901.03 652.45,901.03 724.31,972.88 724.31,984.31 v2(725,985) ; N7.8@635.83,1169.36 659.36,1169.36 729.31,1239.31 729.31,1254.31 v2(730,1255) ; N6.8@635.83,1442.69 657.69,1442.69 729.31,1514.31 729.31,1529.31 v2(730,1530) ; N5.8@635.83,1711.03 656.03,1711.03 734.31,1789.31 734.31,1799.31 v2(735,1800) ; C20.1@724.8,1120.24 724.8,1105.76 725,1105.57 v2(725,985) ; C22.1@730,1655 v2(730,1530) ; C21.1@734.8,1387.28 725.28,1387.28 725.28,1260.7 730,1255.98 v2(730,1255) ; C22.1@735,1660.57 C22.1@735,1663.52 ; C23.1 775,1932.05 735,1892.05 v2(735,1800) ; N8.13 743.78,1002.8 725.98,985 v2(725,985) ; N7.13 747.11,1271.13 730.98,1255 v2(730,1255) ; N6.13 745.44,1544.46 730.98,1530 v2(730,1530) ; N5.13 748.53,1812.8 735.73,1800 v2(735,1800) ; C27.1 1014.96,785.04 v2(1060,740) ; N4.8@976.03,2099.17 976.03,2078.97 1045,2010 v2(1065,2010) ; N9.13 1047.2,753.78 1060,740.98 v2(1060,740) ; N4.13 1077.79,1996.23 1065,2009.02 v2(1065,2010) ; N9.8 1148.97,628.59 1148.97,664.62 1074.28,739.31 1060.69,739.31 v2(1060,740) ; C19.1@1190,2010 v2(1065,2010) ; C26.1 1199.76,735.28 1214.16,735.28 1214.43,735 v2(1330,735) ; N3.8@1246.03,2099.17 1246.03,2073.97 1315,2005 v2(1335,2005) ; N10.13 1316.98,748.53 1330,735.51 v2(1330,735) ; N3.13 1347.8,1991.22 1335,2004.02 v2(1335,2005) ; N10.8@1418.75,647.99 1418.75,664.62 1348.75,734.62 1330.38,734.62 v2(1330,735) ; C18.1@1460,2005 v2(1335,2005) ; C25.1 v2(1600,740) ; C18.1@1467.05,2000 C18.1 ; N2.8@1515.58,2100.24 1515.58,2074.42 1585,2005 v2(1605,2005) ; N11.13 1586.76,754.22 1600,740.98 v2(1600,740) ; N2.13 1617.35,1991.67 1605,2004.02 v2(1605,2005) ; N11.8@1688.53,647.99 1688.53,666.47 1615.69,739.31 1600.69,739.31 v2(1600,740) ; C17.1@1725,2005 v2(1605,2005) ; C24.1 1737.95,740.04 1747.99,730 v2(1865,730) ; N1.8@1785.36,2100.24 1785.36,2074.64 1855,2005 v2(1880,2005) ; N12.13 1857.13,855.74 1857.13,737.87 v2(1865,730) ; N1.13 1887.13,1996.89 1880,2004.02 v2(1880,2005) ; N12.8 1958.3,628.59 1958.3,664.62 1893.62,729.31 1865.69,729.31 v2(1865,730) ; C16.1@2009.95,2004.76 1990.8,2004.76 1990.57,2005 v2(1880,2005) ; R5.1 2604.96,1197.04 2632.64,1224.72 USB1.2 ; R6.1 2604.96,1592.96 2632.64,1565.28 USB1.1
  other v2: 2270,900 2240,1045 2270,1870 2245,2010
  other v4: 118.11,118.11 2638.72,118.11 118.11,2637.8 2638.72,2638.72
N1: N1.9 N2.14 | length 238.7
  Top Layer w10: N2.14 1642.94,1845.86 1648.8,1840 1778.91,1840 1784.76,1845.86 N1.9
N2: N2.9 N3.14 | length 238.7
  Top Layer w10: N3.14@1373.16,1891.89 1373.16,1845.86 1379.02,1840 1509.13,1840 1514.99,1845.86 N2.9
N3: N3.9 N4.14 | length 236.6
  Top Layer w10: N4.14@1103.61,1890.83 1103.61,1845.86 1109.47,1840 1239.58,1840 1245.43,1845.86 N3.9
N4: N4.9 N5.14 | length 176.6
  Top Layer w10: N5.14@848.17,1842.38 N5.14 944,1838.39 975.43,1869.82 N4.9 N4.9@971.44,1886.83
N5: N5.9 N6.14 | length 235.2
  Top Layer w10: N6.14 889.14,1570.05 895,1575.91 895,1704.58 889.14,1710.43 N5.9
N6: N6.9 N7.14 | length 240.2
  Top Layer w10: N7.14 889.14,1296.72 895,1302.58 895,1436.24 889.14,1442.1 N6.9
N7: N7.9 N8.14 | length 225.2
  Top Layer w10: N8.14 884.14,1028.39 890,1034.24 890,1162.91 884.14,1168.77 N7.9
N8: N8.9 N9.14 | length 273
  Top Layer w10: N8.9 845,899.61 845,855 885,815 1009.24,815 1017.62,823.38 1017.62,852.34 N9.14
N9: N9.9 N10.14 | length 219.5
  Top Layer w10: N9.9 1151.97,858.74 1151.97,894.14 1157.83,900 1283.13,900 1288.99,894.14 1288.99,858.74 N10.14
N10: N10.9 N11.14 | length 229.5
  Top Layer w10: N10.9@1419.57,851.34 1421.75,853.52 1421.75,894.14 1427.61,900 1552.91,900 1558.76,894.14 1558.76,853.97 N11.14@1561.39,851.34
N11: N11.9 N12.14 | length 242.3
  Top Layer w10: N11.9@1689.57,851.34 1689.57,899.14 1695.42,905 1825.53,905 1831.39,899.14 N12.14@1831.39,851.34
NetR2_1: R2.1 USB1.B7 | length 501
  Top Layer w10: R2.1@1940,1365 1940.24,1365.24 2440.55,1365.24 USB1.B7
NetR4_1: R4.1 USB1.B6 | length 505.3
  Top Layer w10: R4.1 USB1.B6@2440.32,1425
NetR5_2: R5.2 USB1.A5 | length 316.8
  Top Layer w10: USB1.A5 2441.69,1344.88 2471.41,1344.88 2534.07,1282.22 R5.2@2534.07,1085
NetR6_2: R6.2 USB1.B5 | length 306.1
  Top Layer w10: USB1.B5 2490.19,1463.9 2534.07,1507.78 2534.07,1694.07 R6.2
OSCIN: C13.2 R1.2 U3.5 X1.3 | length 357.6
  Top Layer w10: X1.3 1125.04,1415.82 1125.04,1457.91 ; C13.2@1125.04,1500 1125.04,1457.91 ; U3.5 1344.1,1385 1283.9,1385 1263.94,1404.96 R1.2 1260.99,1439.01 1242.09,1457.91 1125.04,1457.91
OSCOUT: C14.2 R1.1 U3.6 X1.1 | length 297.4
  Top Layer w10: X1.1@1189.71,1326.44 1189.96,1326.19 C14.2 1220,1255 1260.99,1295.99 R1.1 1263.94,1340 1288.78,1364.84 U3.6
PA0: U3.10
PA1: U3.11
PA2: U3.12
PA3: U3.13
PA4: U3.14
PA6: N1.12 N2.12 N3.12 N4.12 N5.12 N6.12 N7.12 N8.12 N9.12 N10.12 N11.12 N12.12 pad.18 U3.16 | length 5764.4
  Top Layer w10: N8.12 845.27,976.1 v1(898.9,976.1) ; N7.12 844.71,1245 v1(900,1245) ; N6.12 913.87,1518.87 v1(915,1520) ; N5.12 845.57,1788.6 913.6,1788.6 v1(915,1790) ; v1@1052.59,1834.67 N4.12@1052.59,1890.44 ; v1(1070,915) 1071.4,913.6 1071.4,857.74 N9.12 ; v1@1322.59,1834.67 N3.12@1322.59,1890.44 ; N10.12 1343.79,857.55 1343.79,913.79 v1(1345,915) ; pad.18 1455.89,1050.89 1455.89,1192.7 U3.16 1455.89,1194.47 1455.89,1284.11 v1(1455,1285) ; N2.12 1592.14,1891.5 1592.14,1835.73 v1(1592.53,1835.35) ; N11.12 1613.68,857.66 1613.68,908.68 v1(1615,910) ; v1(1860,1835) 1860.77,1835.77 1860.77,1891.12 N1.12 ; v1(1880,910) 1881.06,908.94 1881.06,857.4 N12.12
  Bottom Layer 1 w10: v1(898.9,976.1) 900,975 985,975 1010,1000 1010,1220 ; v1(900,1245) 985,1245 1010,1220 ; v1(915,1520) 985,1520 1010,1545 ; v1(915,1790) 985,1790 1010,1765 1010,1545 ; v1(1052.98,1834.29) 1052.98,1747.02 1080,1720 1300,1720 ; v1(1070,915) 1070,980 1095,1005 1375,1005 ; v1(1322.98,1834.29) 1322.98,1742.98 1300,1720 ; v1(1345,915) 1345,975 1375,1005 ; 1455,1715 v1(1455,1285) ; v1(1592.53,1835.35) 1590,1832.82 1590,1750 1620,1720 ; v1(1615,910) 1615,975 1585,1005 ; v1(1860,1835) 1860,1745 1835,1720 1620,1720 ; v1(1880,910) 1880,975 1850,1005 1585,1005 ; 1010,1220 1010,1285 ; 1010,1285 1010,1545 ; 1010,1285 v1(1455,1285) ; 1300,1720 1460,1720 1620,1720 ; 1375,1005 1455,1005 ; 1455,1005 1585,1005 ; 1455,1005 v1(1455,1285)
PA8: U3.29
PA9: U3.30
PA10: U3.31
PA15: U3.38
PB0: U3.18
PB1: U3.19
PB3: U3.39
PB4: U3.40
PB5: U3.41
PB6: U3.42
PB7: U3.43
PB8: U3.45
PB9: U3.46
PB10: U3.21
PB11: U3.22
PB12: U3.25
PB13: U3.26
PB14: U3.27
PB15: U3.28
RESET: U3.7
SPI1_MOSI: N1.14 R8.1 | length 1207.2
  Top Layer w10: R8.1 1575,1020 1845,1020 1915,1090 v1(1915,1315) ; N1.14 1913.86,1890.75 1913.86,1476.14 v1(1915,1475)
  Bottom Layer 1 w10: v1(1915,1315) v1(1915,1475)
SPI1_SCK: N1.11 N2.11 N3.11 N4.11 N5.11 N6.11 N7.11 N8.11 N9.11 N10.11 N11.11 N12.11 R7.1 | length 5298.2
  Top Layer w10: N8.11 845.79,950 950,950 995,995 995,1179.14 ; N7.11 848.17,1215.95 873.43,1215.95 875.03,1214.35 959.79,1214.35 995,1179.14 ; N6.11 847.45,1490 965,1490 995,1520 ; N5.11 958.39,1761.61 995,1725 ; N4.11 1025,1889.21 1025,1775 1065,1735 ; N9.11 1098.39,948.39 ; N3.11 1292.62,1886.83 1292.62,1861.57 1291.02,1859.97 1291.02,1771.02 1255,1735 ; R7.1 1332.57,1017.53 1098.39,1017.53 ; N10.11 1370,858.18 1370,950 1330,990 ; N2.11 1565,1890.72 1565,1770 1600,1735 ; N11.11 1640,858.4 1640,955 1675,990 ; N1.11 1835.95,1775.95 1795,1735 1600,1735 ; N12.11 1907.72,952.28 1870,990 1675,990 ; 995,1179.14 995,1520 ; 995,1520 995,1725 ; 995,1725 1025,1695 ; 1025,1695 1025,1090.91 1098.39,1017.53 ; 1025,1695 1065,1735 ; 1065,1735 1255,1735 ; 1098.39,948.39 1140,990 1330,990 ; 1098.39,948.39 1098.39,1017.53 ; 1255,1735 1600,1735 ; 1330,990 1675,990
SPI_MOSI: R8.2 U3.17 | length 114.1
  Top Layer w10: U3.17 1476.46,1118.54 R8.2
SPI_SCK: R7.2 U3.15 | length 118.6
  Top Layer w10: R7.2 1407.95,1089.96 1437.09,1119.1 U3.15
SWDCLK: pad.3@1485,1665 U3.37 | length 232.5
  Top Layer w10: 1485,1645 1485,1600 1510,1575 1596.08,1575 1614.26,1556.83 U3.37
SWDIO: pad.2@1535,1665 U3.34 | length 343.2
  Top Layer w10: v1(1535,1600) pad.2@1535,1650 ; v1(1560,1425) 1560.55,1424.45 1666.86,1424.45 U3.34
  Bottom Layer 1 w10: v1(1535,1600) 1535,1450 v1(1560,1425)
USBDM/D-: R2.2 U3.32 | length 235.7
  Top Layer w10: U3.32 1875.47,1384.53 R2.2
USBDN/D+: R3.1 R4.2 U3.33 | length 236.2
  Top Layer w10: U3.33 1796.26,1404.21 1817.05,1425 R3.1 R4.2
VBAT: U3.1
VCC3V3: C15.2 C16.2 C17.2 C18.2 C19.2 C20.2 C21.2 C22.2 C23.2 C24.2 C25.2 C26.2 C27.2 N1.10 N1.16 N2.10 N2.16 N3.10 N3.16 N4.10 N4.16 N5.10 N5.16 N6.10 N6.16 N7.10 N7.16 N8.10 N8.16 N9.10 N9.16 N10.10 N10.16 N11.10 N11.16 N12.10 N12.16 pad.12 pad.13 pad.16 U2.5 | length 3366.8
  Top Layer w20: C22.2@802.13,1661.36 802.13,1635.12 816.01,1621.23 N6.16 ; C22.2@804.29,1659.19 C22.2@799.96,1663.52 ; pad.12 820,800.24 798.17,822.07 798.17,916.06 807.54,925.43 843.58,925.43 N8.10 908,926.02 924.02,910 v1(925,910) C27.2 969.43,850 970.43,851 N9.16 ; C23.2@839.96,1937.95 844.72,1942.72 868.93,1966.92 ; N8.16 807.86,1079.57 796.15,1091.28 796.15,1123.81 C20.2 ; N7.10 843.58,1193.76 807.54,1193.76 794.96,1181.18 C20.2 ; N7.16 806.72,1347.9 795,1359.62 C21.2 ; N6.10 843.58,1467.1 804.69,1467.1 792.98,1455.38 792.98,1397.02 C21.2 ; N5.10 843.58,1735.43 807.54,1735.43 798.17,1726.06 798.17,1665.31 C22.2@799.96,1663.52 ; N5.16 840.96,1889.57 839.96,1890.57 C23.2 889.02,1935 914.02,1910 v1(915,1910) ; v1(850,1125) C20.2 ; v1(850,1395) C21.2 ; v1(850,1665) 849.31,1664.31 800.74,1664.31 C22.2@799.96,1663.52 ; pad.13@868.93,2018.93 868.93,1966.92 ; N4.10 1000.43,1891.42 1000.43,1927.46 960.97,1966.92 868.93,1966.92 ; N9.10@1124.57,836.34 1124.57,816.72 1136.29,805 C26.2 ; N4.16 1154.57,1927.1 1166.28,1938.81 1198.81,1938.81 C19.2 v3(1200,1885) ; v1(1195,860) C26.2 ; C19.2@1200,1936.83 1261.06,1936.83 1270.43,1927.45 1270.43,1891.42 N3.10 ; N10.16 1240.21,818.13 1228.49,806.41 1196.41,806.41 C26.2 ; N10.10@1394.35,836.34 1394.35,816.68 1406.06,804.96 C25.2 ; N3.16 1424.57,1922.13 1436.28,1933.85 1468.81,1933.85 C18.2 v3(1470,1885) ; v1(1465,860) C25.2 ; C18.2@1468.81,1933.81 1472.89,1937.89 1530.61,1937.89 1539.98,1928.52 1539.98,1892.48 N2.10 ; N11.16 1509.99,818.31 1498.27,806.59 1466.63,806.59 C25.2 ; N11.10@1664.12,836.34 1664.12,816.72 1675.84,805 C24.2 ; N2.16 1694.12,1926.17 1706.52,1938.57 1738.57,1938.57 C17.2@1740,1940 ; v1(1735,860) C24.2 ; v3(1740,1885) C17.2@1740,1930.27 ; C17.2@1740,1937.89 1800.39,1937.89 1809.76,1928.52 1809.76,1892.48 N1.10 ; N12.16 1779.76,819.29 1767.69,807.22 1737.22,807.22 C24.2 ; N12.10 1933.9,855.74 1933.9,766.1 1965,735 v1(2015,735) ; N1.16 1964.9,1892.89 1964.9,1919.17 1964.9,1921.8 1976.62,1933.52 2008.48,1933.52 C16.2 v3(2010,1880) ; 2135,2125 pad.16
  other v2: 2025,2095
VCC3V3_MCU: C1.2 C2.2 C3.2 C4.2 C11.2 pad.4@1435,1665 pad.9 pad.10 pad.11 pad.17 R3.2 U1.5 U3.9 U3.24 U3.36 U3.48 | length 1341.5
  Top Layer w15: v2(1260,1525) 1389.14,1525 1396.41,1517.73 U3.48@1396.41,1516.24 ; 1304.13,1305.79 U3.9 ; 1375,1525 1375,1615 1425,1665 pad.4@1440,1665
  Top Layer w20: pad.11 v2@1299,1100 ; C4.2@1297.08,1176.41 1297.08,1298.73 1304.13,1305.79 ; v2@1299.98,1095.02 C4.2 ; 1621.68,1184.96 C1.2 ; v2(1675,1605) C2.2 1675,1470 1675.04,1470.04 C2.2 ; v2(1675,1605) 1675.08,1605 1760,1605 1820,1545 R3.2 ; C1.2 v2(1774,1185) pad.10 ; 2130,1155 pad.17 pad.17@2130.61,1194.39
  other v2: 1300,1101 2025,1110
pads on no net: N12.9 U3.2 U3.3 U3.4 USB1.0 USB1.A6 USB1.A7 USB1.A8 USB1.B8

## Polygon pours and split planes (outlines as drawn)
GND on GND (split plane): 359 vertices, not listed, extent 20.09,20.41 2735.32,2736.13
GND on Power (split plane): 359 vertices, not listed, extent 20.09,20.41 2735.32,2736.13
VCC3V3 on Power (split plane): 2064.9,1695.1 1100,1695.1 1098.05,1694.71 1096.4,1693.6 1036.4,1633.6 1035.29,1631.95 1034.9,1630 1034.9,1095 1035.29,1093.05 1036.4,1091.4 1096.4,1031.4 1098.05,1030.29 1100,1029.9 2064.9,1029.9 2064.9,1005 2064.9,535 2064.9,530.1 587.11,530.1 520.1,597.11 520.1,2137.89 587.11,2204.9 2064.9,2204.9
+5 on Power (split plane): 2299.9,2137.89 2299.9,587.11 2242.89,530.1 2075.1,530.1 2075.1,535 2075.1,1055 2075.1,2204.9 2232.89,2204.9
VCC3V3_MCU on Power (split plane): 2064.9,1055 2064.9,1040.1 1102.11,1040.1 1045.1,1097.11 1045.1,1627.89 1102.11,1684.9 2064.9,1684.9

## Other copper
Top Layer:
  rectangle net +5: 2181.68,685 2295,785
  rectangle net +5: 2195,1655 2300,1755
  rectangle net +5: 2188.32,875.46 2225,945.46
  rectangle net +5: 2192,1845 2230,1915
  rectangle net GND: 2245,795 2295,965
  rectangle net GND: 2245,1770 2298.68,1935
  rectangle net VCC3V3: 2050,1965 2160,2060
  rectangle net GND: 2168.68,1925 2298.68,2102.04
  rectangle net GND: 2153.68,1865 2185.68,1954.54
  rectangle net +5: 2088.68,1655 2230,1855
  rectangle net +5: 2108.68,1849.54 2147.68,1915
  rectangle net VCC3V3: 1985,2035 2160,2139.54
  rectangle net VCC3V3_MCU: 1970,995 2150,1170
  rectangle net +5: 2105,880 2144,950
  rectangle net +5: 2085,685 2225,885
  rectangle net +5: 2190,1225 2390,1330
  rectangle net GND: 2150,895 2182,985
  rectangle net GND: 2165,955 2295,1132.5
  rectangle net +5: 2190,1455 2390,1560
Power (plane layer: these items are gaps in the copper):
  lines w10: 2065,1690 1100,1690 1040,1630 1040,1095 1100,1035 2070,1035 2070,1005 ; 2070,525 2070,535 2070,1055 2070,2210 ; 515,595 585,525 2035,525 2245,525 2305,585 2305,2140 2235,2210 585,2210 515,2140 515,595

## Silkscreen, mask and mechanical layers (free items; w line width, h text height)
Top Overlay:
  text "3.3V" at 2106,2206 h25
  text "3.3V" at 831,2056 h25
  text "3.3V" at 1444,1696 h25 r90
  text "SWDCLK" at 1499,1696 h25 r90
  text "SWDIO" at 1549,1696 h25 r90
  text "GND" at 1599,1696 h25 r90
  text "3.3V" at 1846,1576 h25
  text "5V" at 2291,1576 h25
  text "3.3V" at 1811,1256 h25
  text "3.3V" at 2086,1226 h25
  text "5V" at 2286,1176 h25
  text "3.3V" at 1091,1086 h25
  text "PA6" at 1421,976 h25
  text "3.3V" at 781,736 h25
Mechanical 1:
  lines w10: 0,2226.81 0,2640 cw(c117.5,2637.5) 120,2755 ; 0.31,121.22 0.31,572.68 cw(c117.81,570.18) 120.31,687.68 ; 0.91,2225.91 ccw(c118.41,2223.41) 115.91,2105.91 191.53,2105.91 cw(c194.03,2063.41) 236.54,2065.91 236.53,733.58 cw(c194.03,731.08) 196.54,688.58 120.31,688.58 ; 1.22,120.31 ccw(c118.72,117.81) 116.22,0.31 585,0.31 ; 120,2756.22 589.09,2756.22 cw(c586.59,2638.72) 704.09,2636.22 704.09,2560.91 ; 585,1.22 ccw(c587.5,118.72) 705,116.22 705,191.53 cw(c747.5,194.03) 745,236.54 2077.32,236.53 cw(c2079.82,194.03) 2122.32,196.54 2122.32,121.22 ; 705,2560 ccw(c747.5,2562.5) 750,2520 2082.32,2520 ccw(c2079.82,2562.5) 2122.32,2565 2122.32,2640.31 cw(c2239.82,2637.81) 2242.32,2755.31 ; 2123.23,120.31 ccw(c2240.73,117.81) 2238.23,0.31 2635.59,0.31 ; 2242.32,2756.22 2639.69,2756.22 cw(c2637.19,2638.72) 2754.69,2636.22 2754.69,117.13 ; 2635.59,1.22 ccw(c2638.09,118.72) 2755.59,116.22
Drill Drawing:
  text ".Legend" at 2865,1234.99 h60

## Text inside footprints (layer, text, board x,y; h text height)
N1: Mechanical 13 "TSSOP16-0r65-5r0x4r4-H1r2" at 1701.91,2250.1 h39.37 r270
N2: Mechanical 13 "TSSOP16-0r65-5r0x4r4-H1r2" at 1432.14,2250.1 h39.37 r270
N3: Mechanical 13 "TSSOP16-0r65-5r0x4r4-H1r2" at 1162.58,2249.04 h39.37 r270
N4: Mechanical 13 "TSSOP16-0r65-5r0x4r4-H1r2" at 892.58,2249.04 h39.37 r270
N5: Mechanical 13 "TSSOP16-0r65-5r0x4r4-H1r2" at 485.94,1627.56 h39.37
N6: Mechanical 13 "TSSOP16-0r65-5r0x4r4-H1r2" at 485.94,1359.23 h39.37
N7: Mechanical 13 "TSSOP16-0r65-5r0x4r4-H1r2" at 485.94,1085.89 h39.37
N8: Mechanical 13 "TSSOP16-0r65-5r0x4r4-H1r2" at 485.94,817.56 h39.37
N9: Mechanical 13 "TSSOP16-0r65-5r0x4r4-H1r2" at 1232.44,498.1 h39.37 r90
N10: Mechanical 13 "TSSOP16-0r65-5r0x4r4-H1r2" at 1502.22,498.1 h39.37 r90
N11: Mechanical 13 "TSSOP16-0r65-5r0x4r4-H1r2" at 1771.99,498.1 h39.37 r90
N12: Mechanical 13 "TSSOP16-0r65-5r0x4r4-H1r2" at 2041.77,498.1 h39.37 r90
U1: Mechanical 13 "SOT23-5_2r90x1r60-H1r18-P0r95_G" at 1860.51,793.3 h39.37
U2: Mechanical 13 "SOT23-5_2r90x1r60-H1r18-P0r95_G" at 1864.19,1762.84 h39.37
U3: Top Overlay "1" at 1259,1461 h30 r90; Top Overlay "25" at 1706,1216 h30; Top Overlay "37" at 1576,1561 h30; Top Overlay "13" at 1331,1166 h30; Mechanical 13 "LQFP48-0r5-7x7-H1r6" at 1320.4,1070.35 h39.37
X1: Mechanical 13 "RESO3225-4_3r20x2r50-H0r90-P2r10" at 1375.47,1054.36 h39.37 r90